# Altium PCB PMM_MSPC_22A.PcbDoc (part 1 of 5)
Units mm, origin at the board's own origin, x right, y up, seen from the top; angles counter-clockwise.
Board outline 86.91 x 61.9 mm, 4 copper layers (Top Layer, GroundPlane, MidLayer1, Bottom Layer); 159 components, 129 nets, 534 pads, 221 vias.
Unrouted connection lines stored in the file: 40.
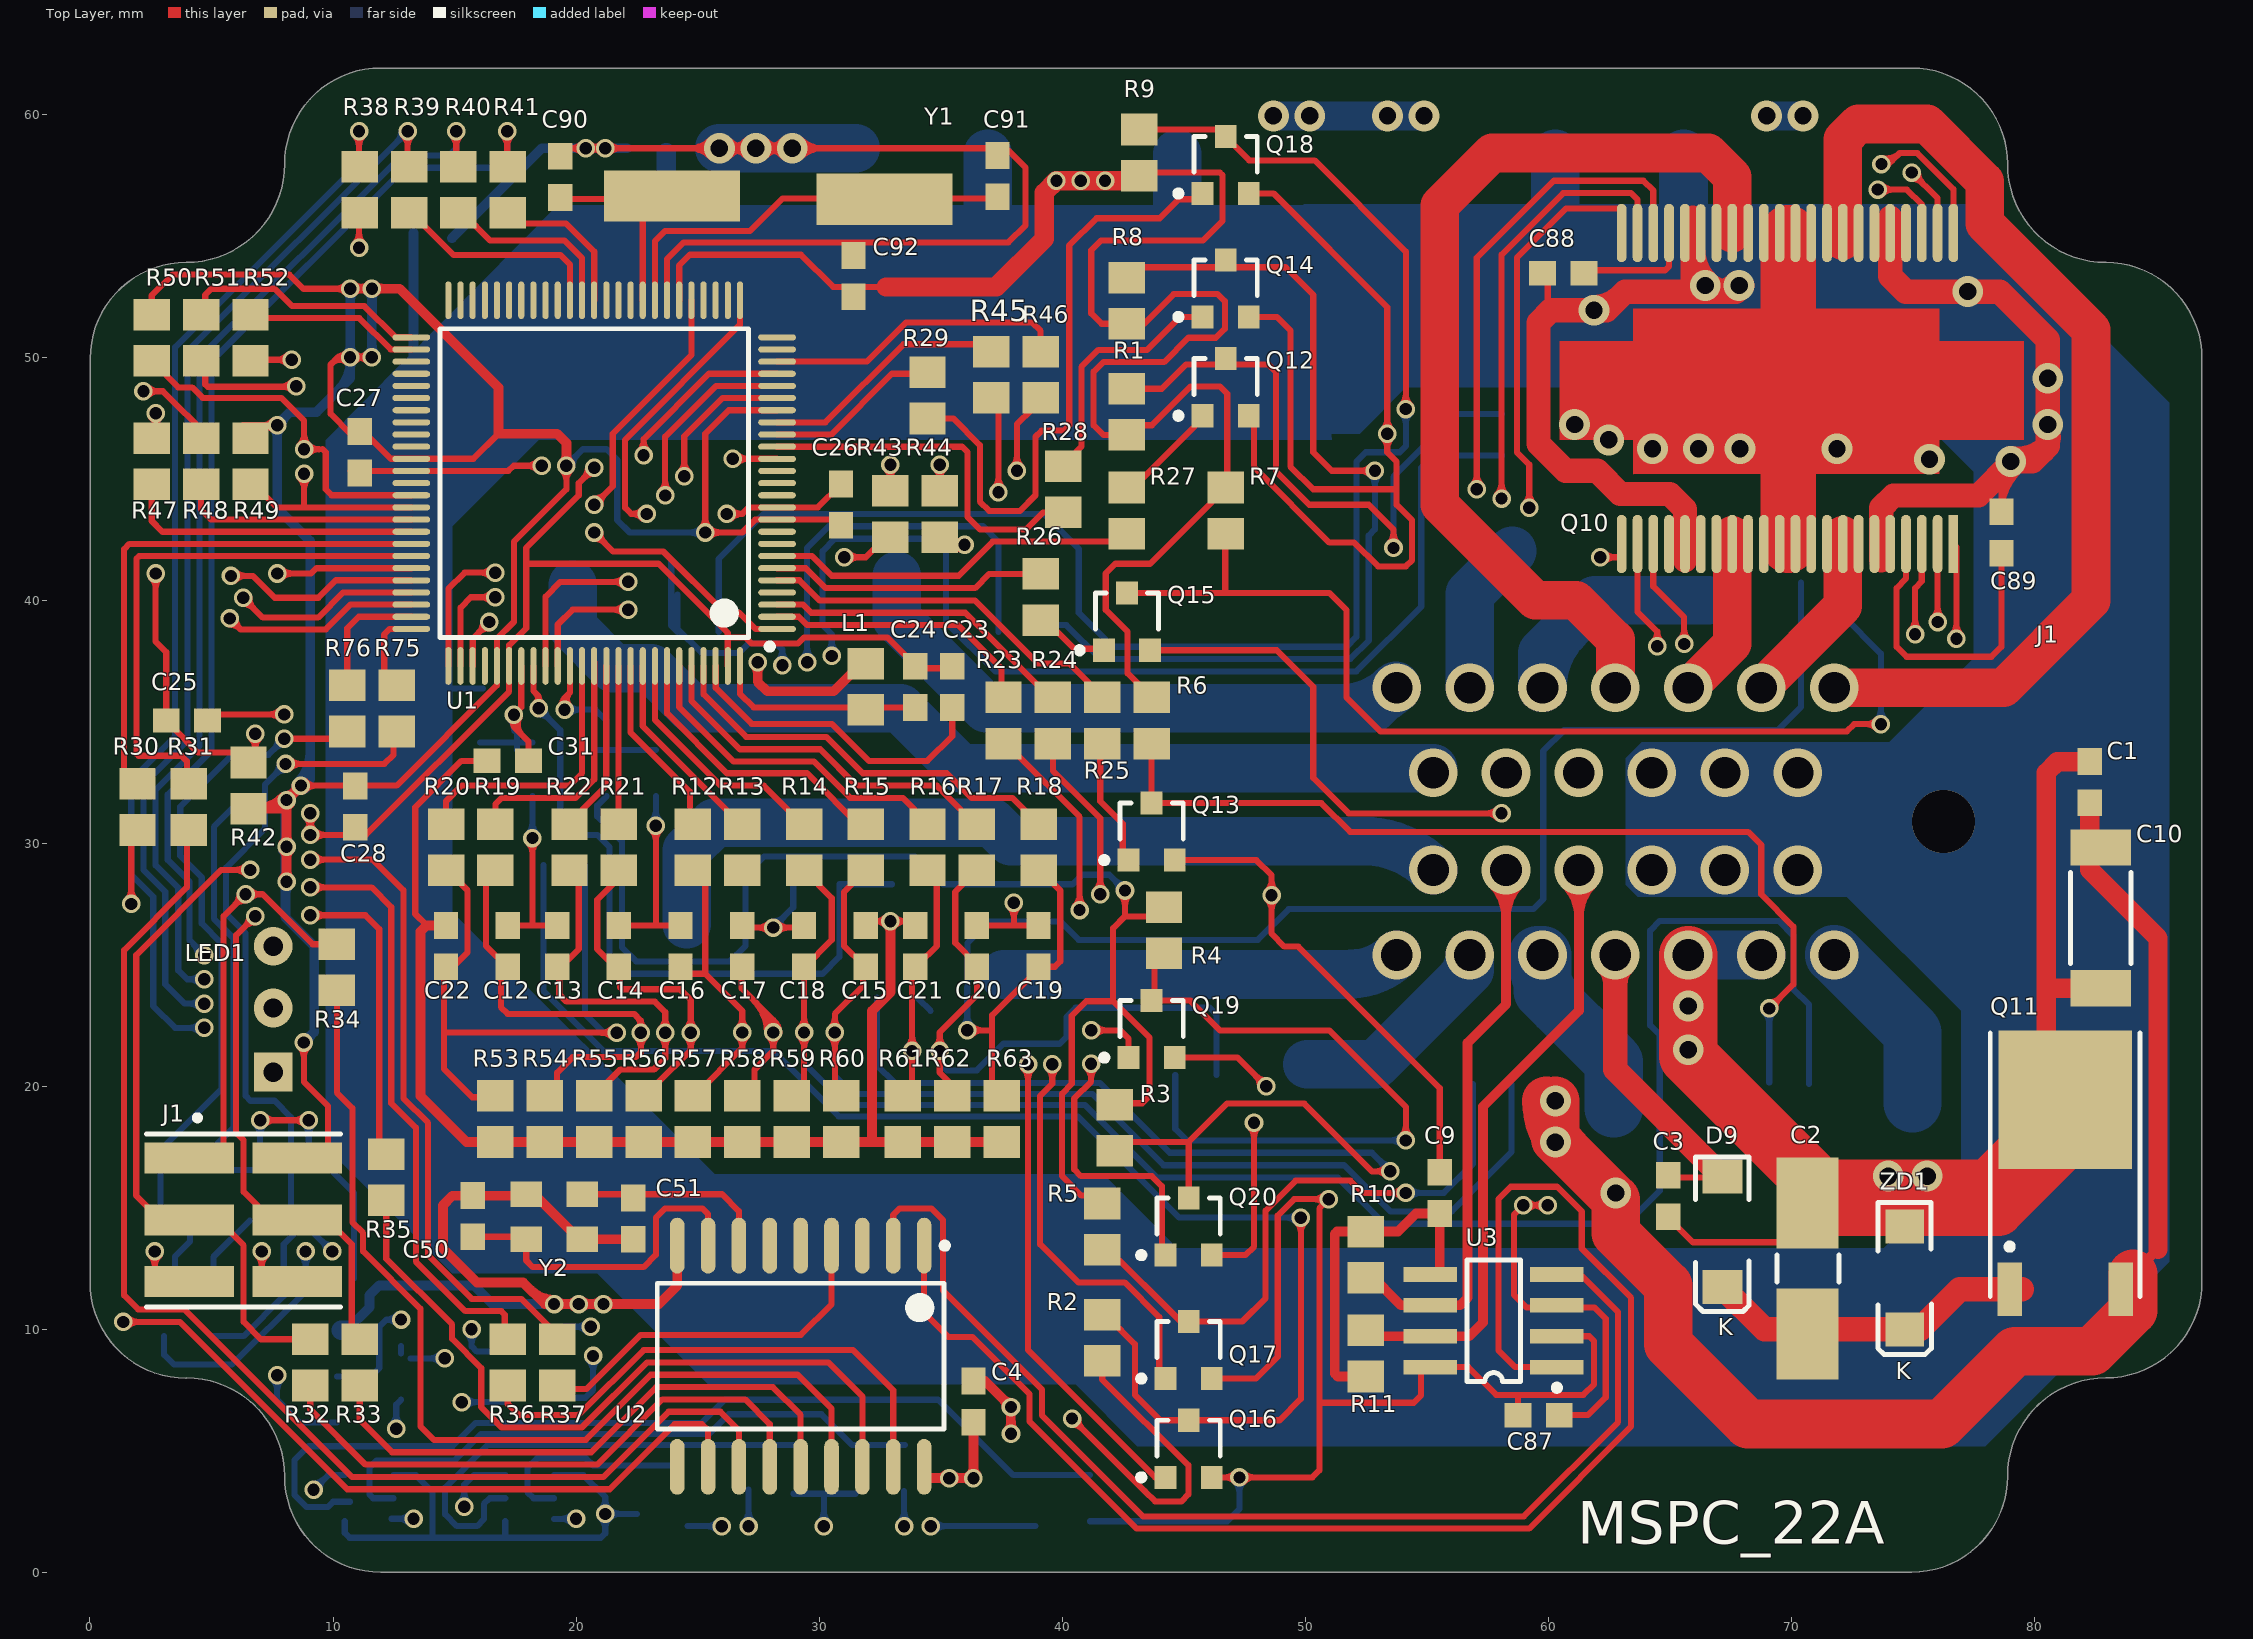
[diagram p0: Top Layer view]
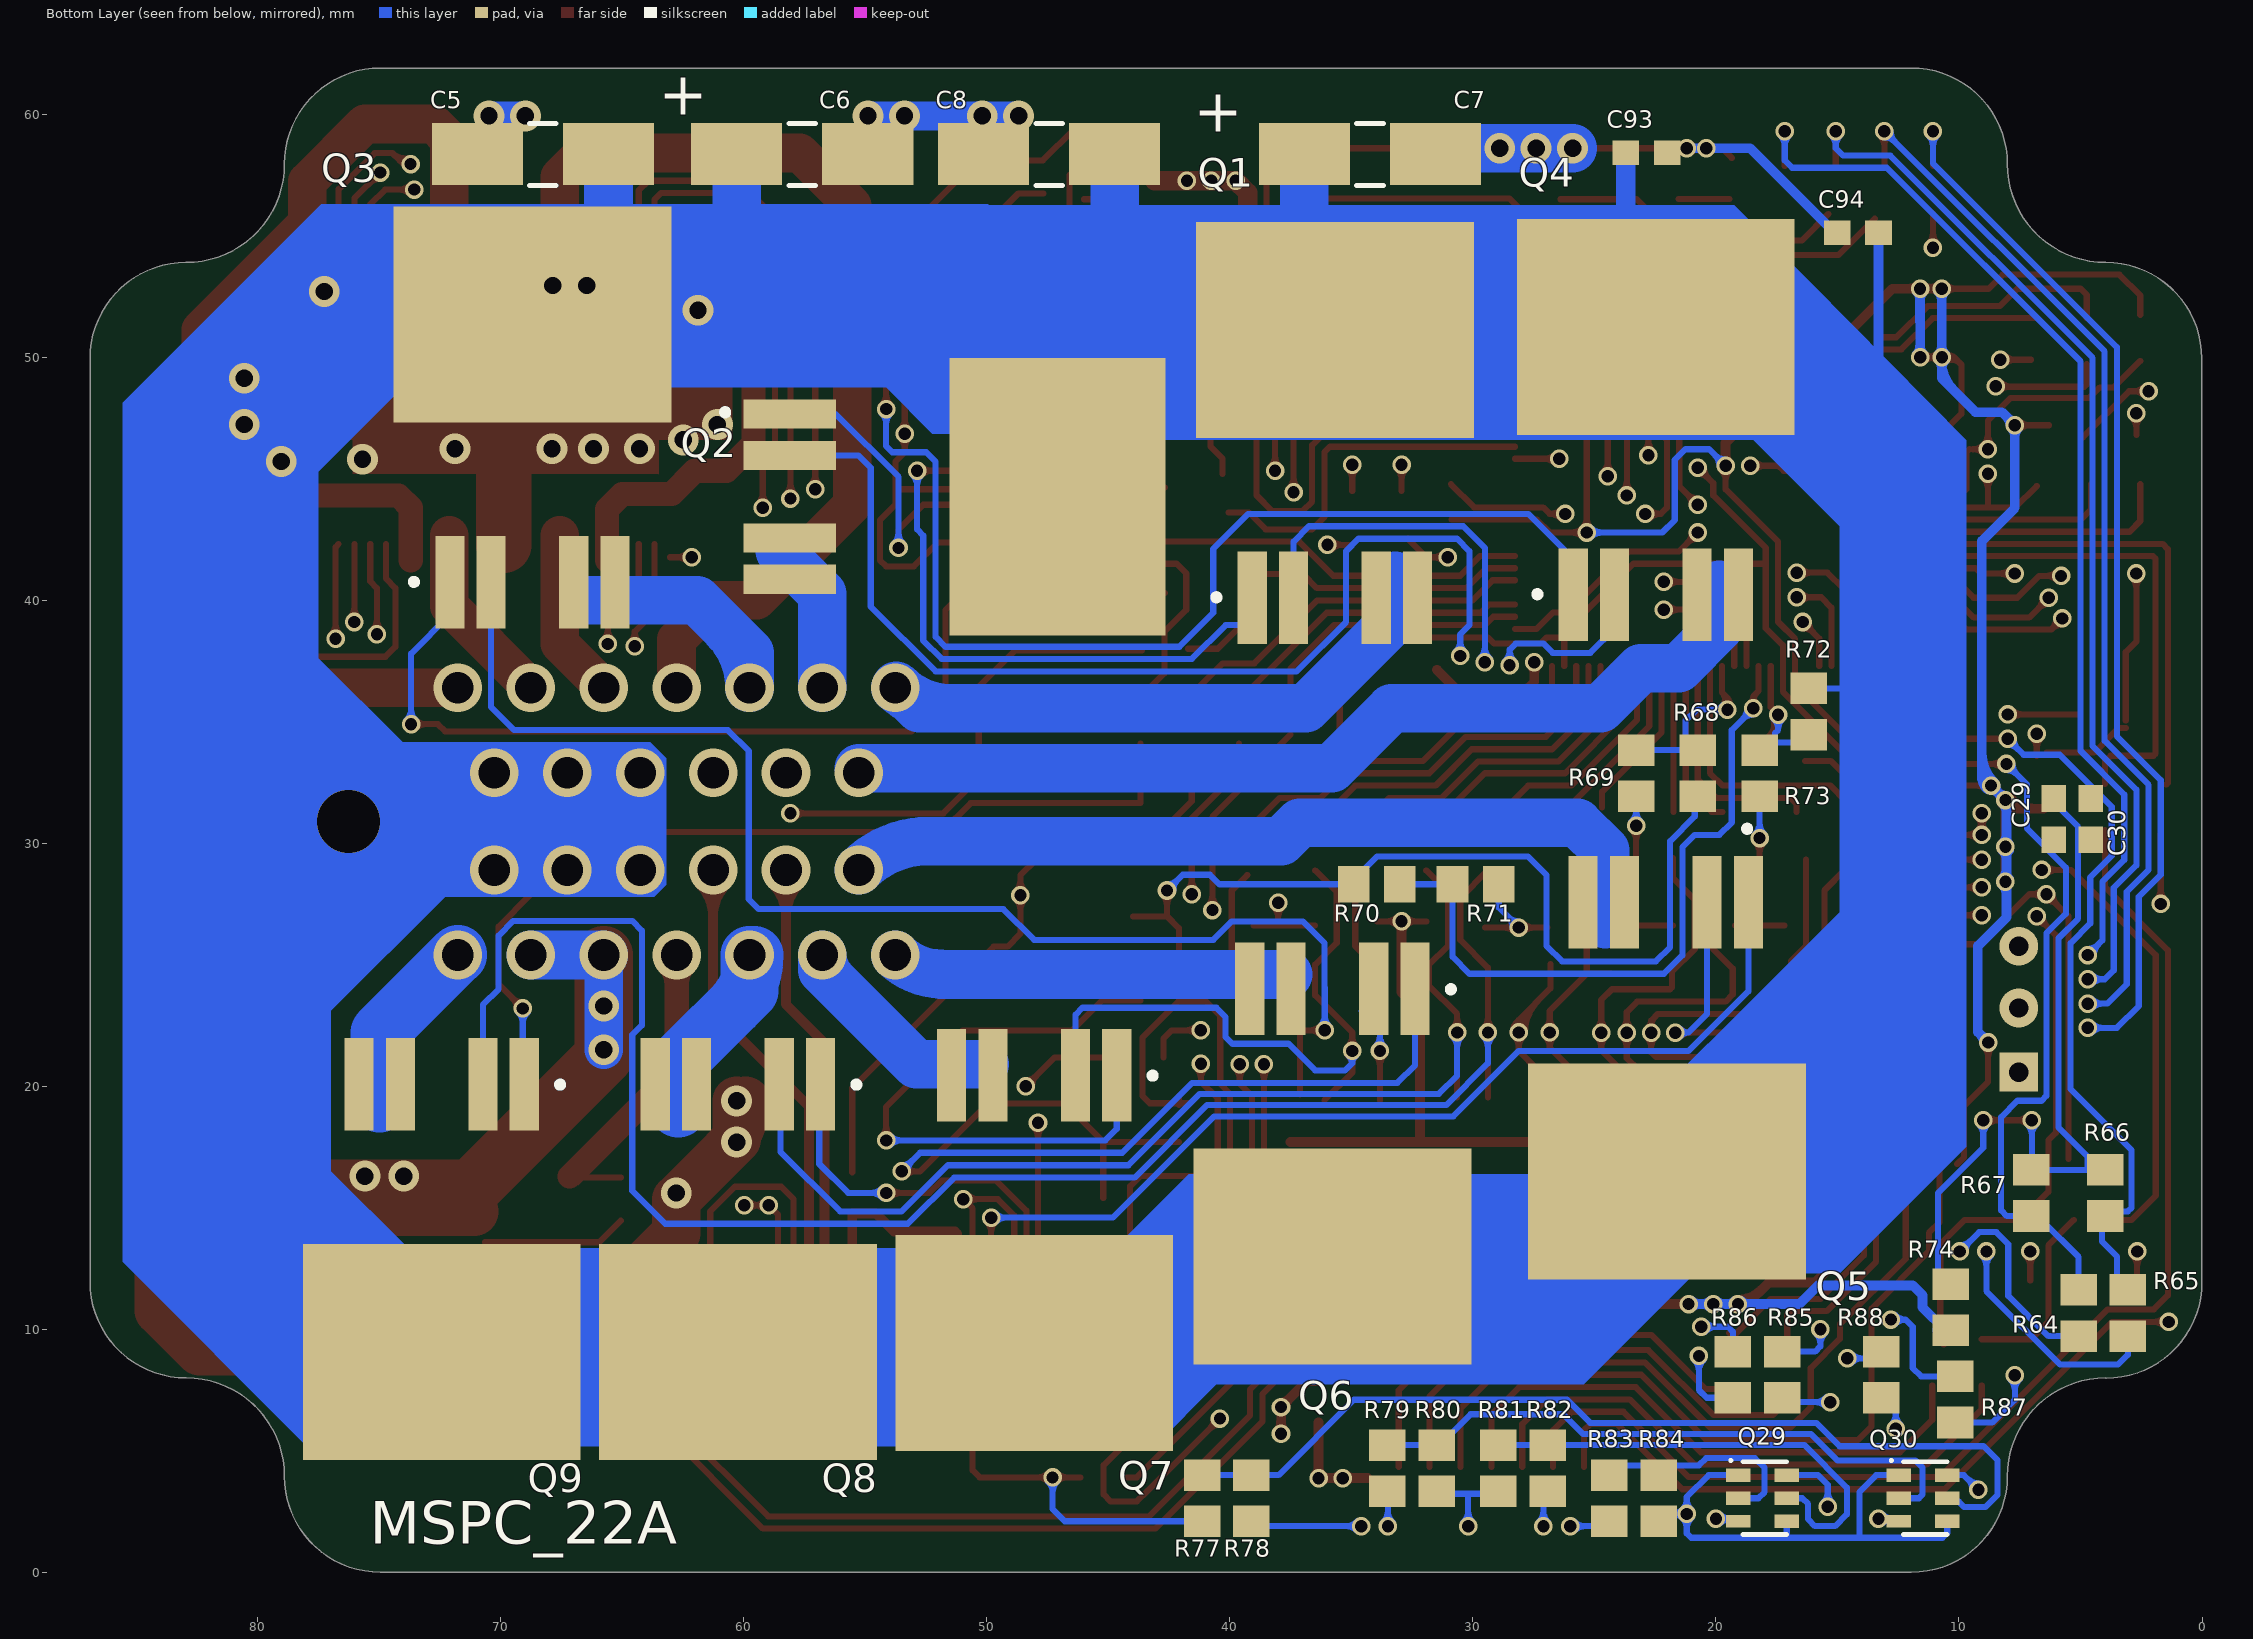
[diagram p1: Bottom Layer view, seen from below]
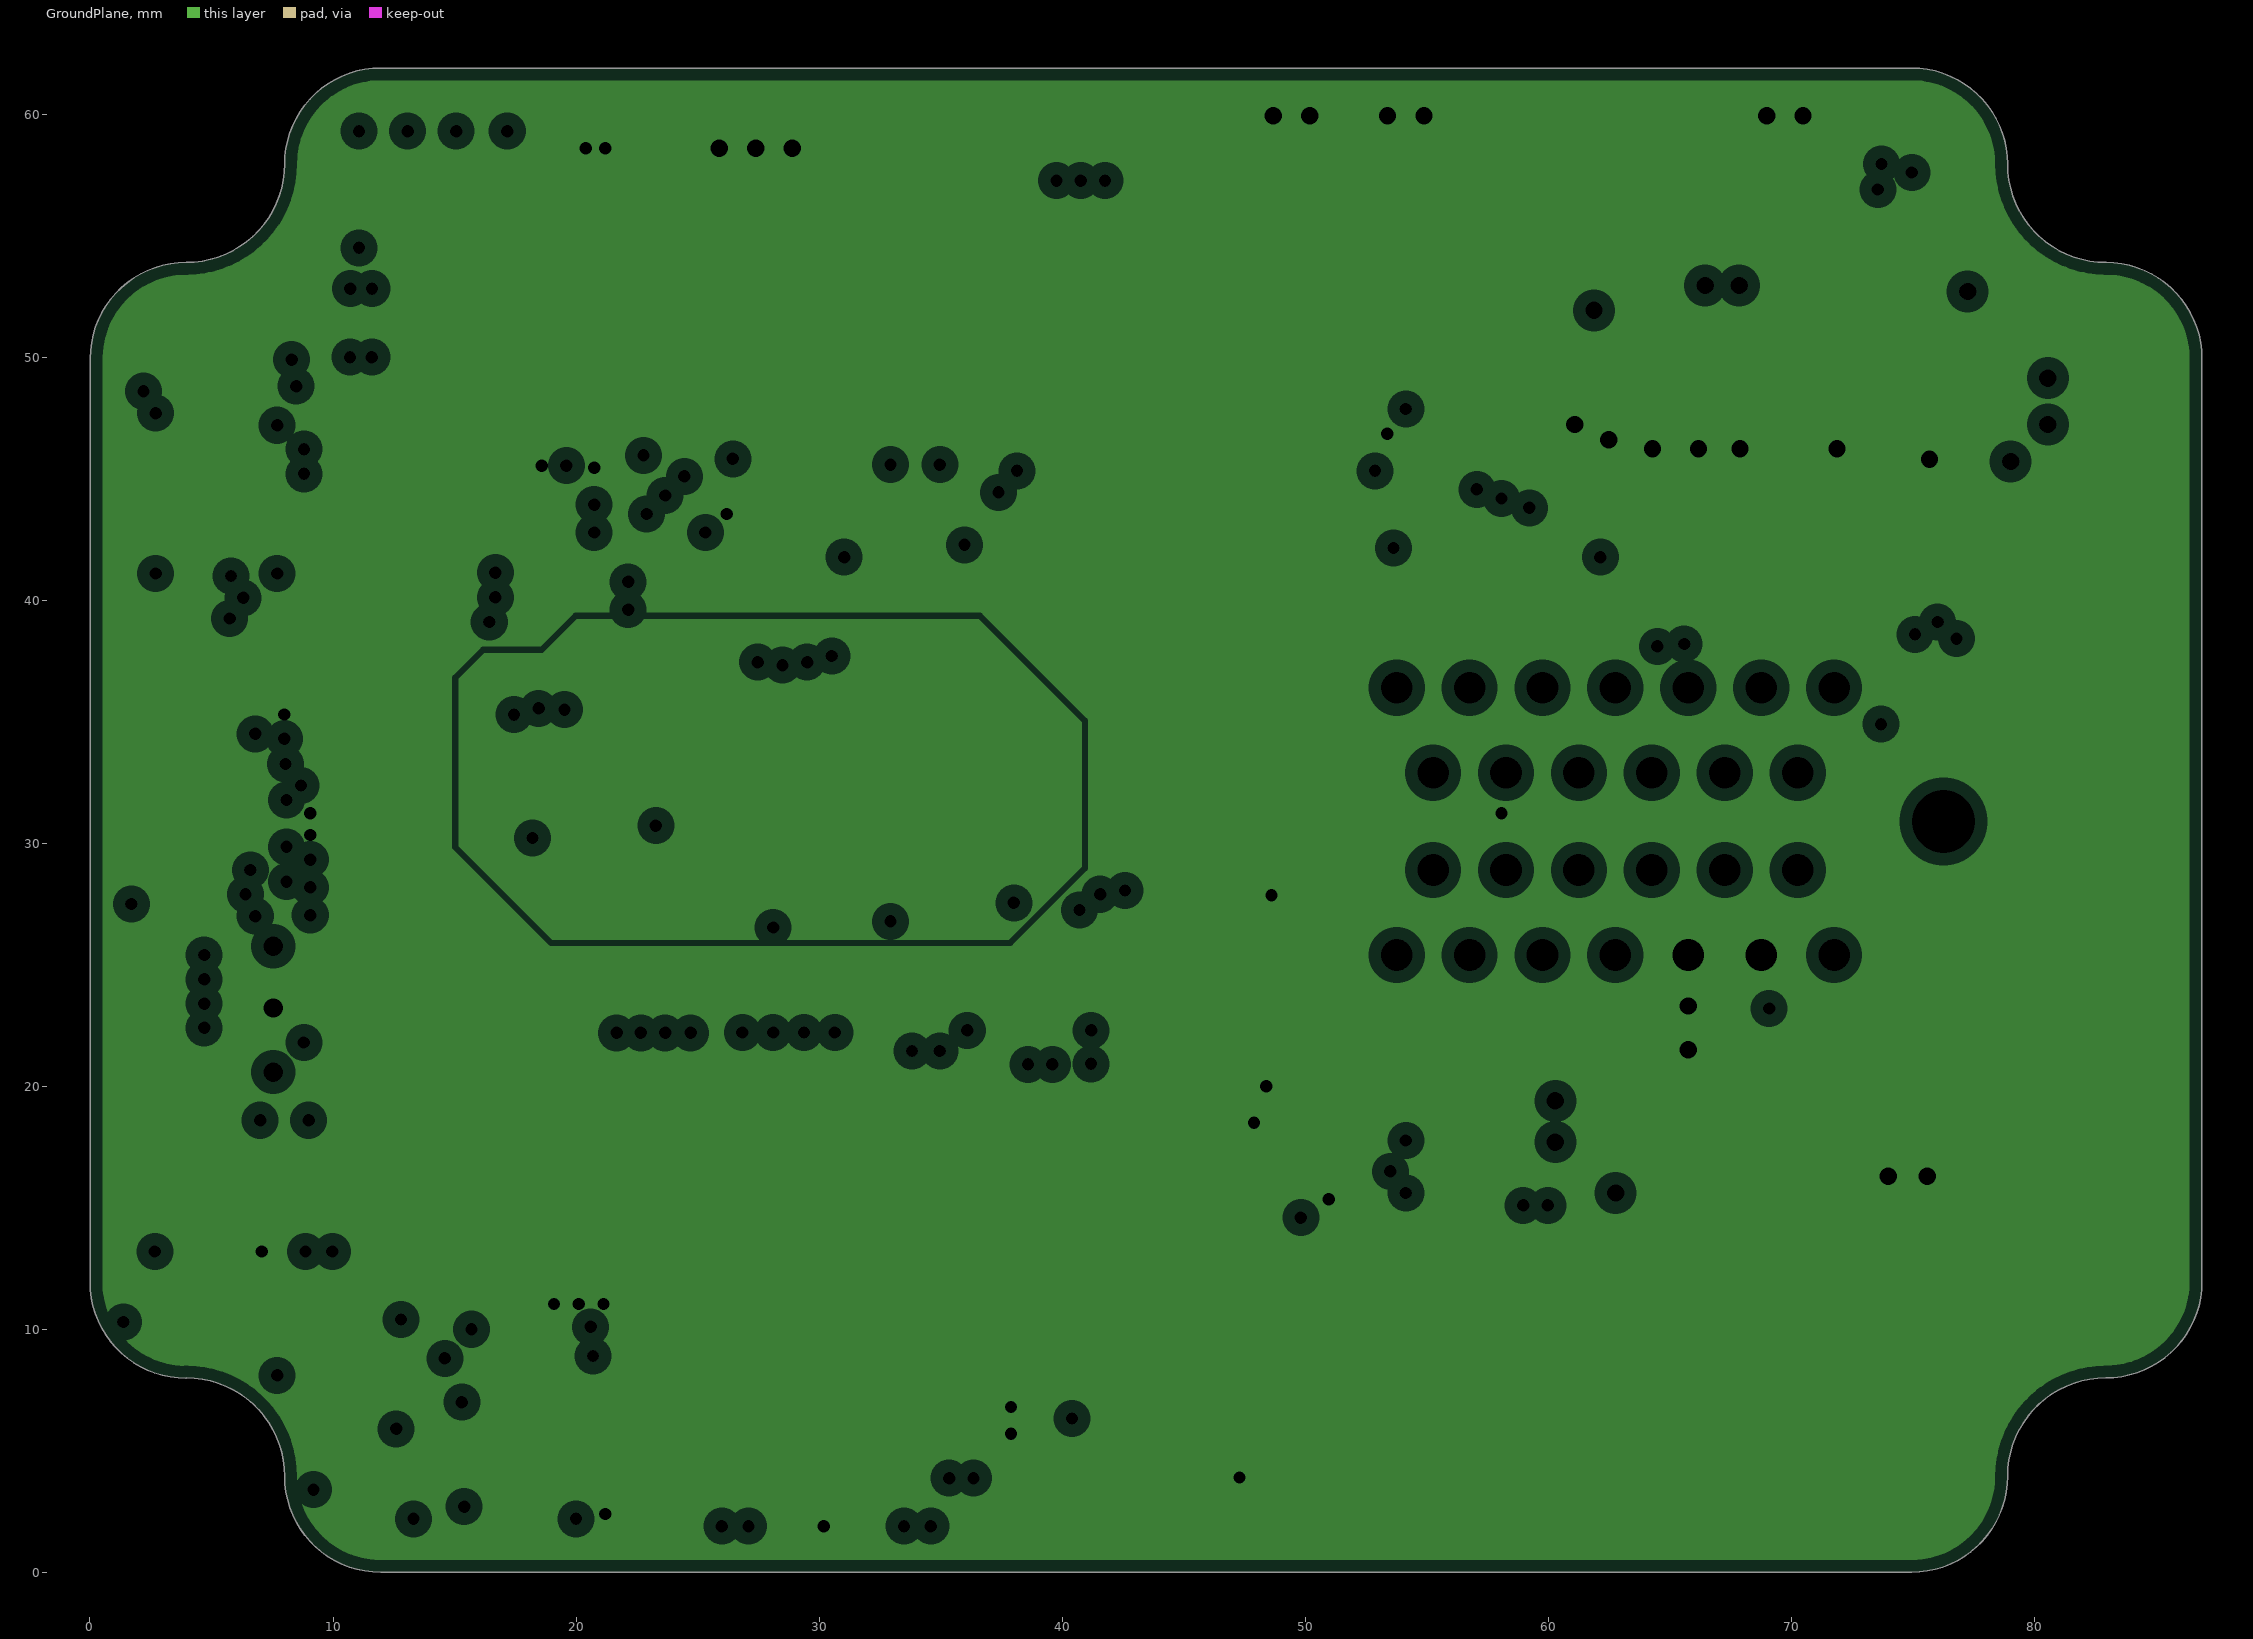
[diagram p2: GroundPlane, clearances drawn from the general rule]
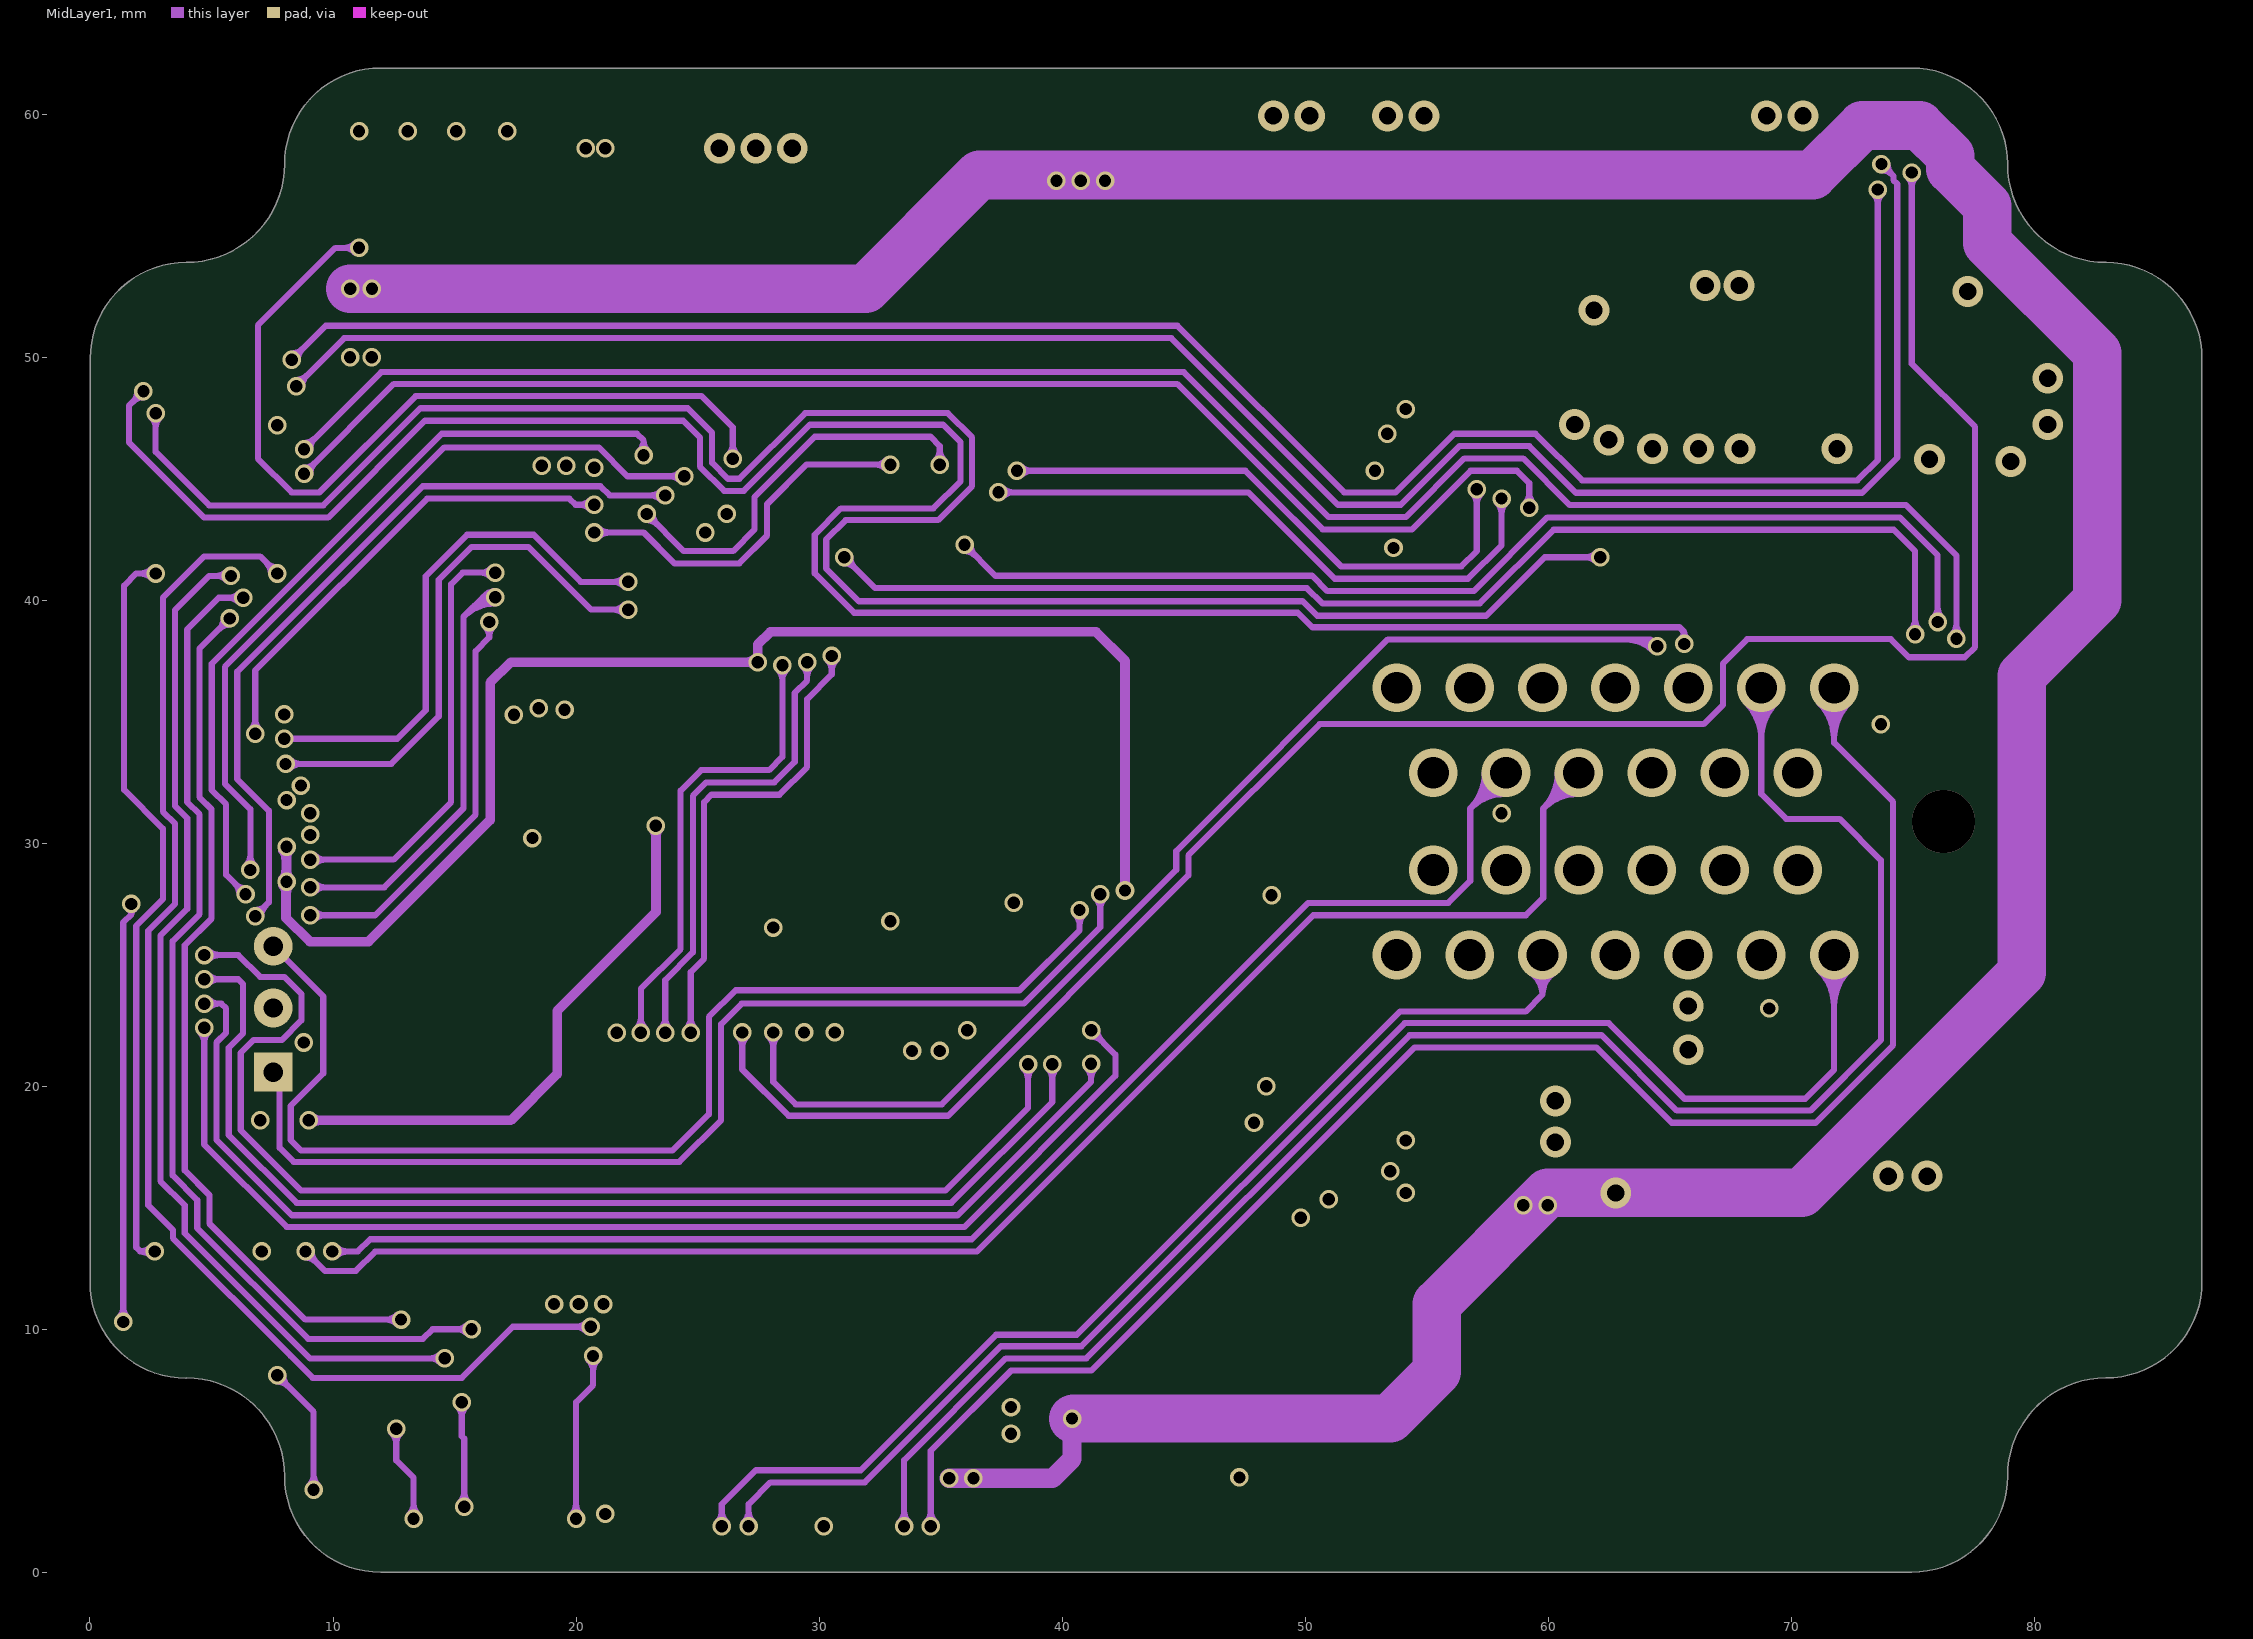
[diagram p3: MidLayer1]

## Layer stack, top to bottom
Top Solder: solder mask 0.0102, Solder Resist, Dk 3.5
Top Layer: signal copper 0.203
Dielectric1: core 0.32, FR-4, Dk 4.8
GroundPlane: plane copper 0.089, net GND
Dielectric3: prepreg 0.32, FR-4, Dk 4.8
MidLayer1: signal copper 0.089
Dielectric2: core 0.32, FR-4, Dk 4.8
Bottom Layer: signal copper 0.203
Bottom Solder: solder mask 0.0102, Solder Resist, Dk 3.5

## Board outline
0.001,11.935 ccw(c3.951,11.935) 3.951,7.985 3.96,8 cw(c3.96,3.95) 8.01,3.95 ccw(c11.96,3.95) 11.96,0 74.96,0 ccw(c74.96,3.95) 78.91,3.95 cw(c82.96,3.95) 82.96,8 ccw(c82.96,11.95) 86.91,11.95 86.91,49.95 ccw(c82.96,49.95) 82.96,53.9 cw(c82.96,57.95) 78.91,57.95 ccw(c74.96,57.95) 74.96,61.901 11.96,61.901 ccw(c11.96,57.95) 8.01,57.95 cw(c3.96,57.95) 3.96,53.9 ccw(c3.96,49.95) 0.01,49.95

## Design rules (kind name [scope] priority, off if disabled: settings)
Clearance [All] p1: gap=0.2 ignorepadtopadclearanceinfootprint=FALSE except(0: Arc-Hole Track-Hole SMDPad-Hole THPad-Hole Via-Hole Fill-Hole Poly-Hole Region-Hole Text-Hole)
FabricationTestPointUsage TestPointUsage [All] p1: valid=0 allowmultiple=FALSE
FabricationTestpoint Testpoint [All] p1: side=3 testpointundercomponent=TRUE minsize=1.016 maxsize=2.54 preferedsize=1.524 minholesize=0 maxholesize=1.016 preferedholesize=0.813 testpointgrid=0.025 allowsidetop=TRUE allowsidebottom=TRUE usegrid=TRUE gridtolerance=0
PlaneClearance [All] p1: clearance=0.508
PlaneConnect [All] p1: planeconnectstyle=Relief reliefexpansion=0.508 reliefentries=4 reliefconductorwidth=1 reliefairgap=0.254
PolygonConnect [All] p1: connectstyle=Relief reliefconductorwidth=0.254 reliefentries=4 polygonreliefangle="90 Angle" airgapwidth=0.254
RoutingVias [All] p1: holewidth=0.711 width=1.27 viastyle="Through Hole" minholewidth=0.4 minwidth=0.7 maxholewidth=10 maxwidth=10
SolderMaskExpansion [(IsVia)] p1: expansion=-1 istentingtop=FALSE
Width [All] p1: maxlimit=10 minlimit=0.2 preferedwidth=0.254
26 further rules are at their usual default settings.

## Classes and differential pairs
component class Power: C1 C2 C3 C10 D9 Q11 ZD1
component class Outputs: Q14 R8 R28
component class MCU: C24 C26 C27 C28 C92 J1 L1 LED1 R23 R24 R68 R69 U1 Y1
component class CANBUS: C4 R30 R31 R32 R33 R34 R35 R37 U2 Y2

## Components (designator, comment, footprint, x,y, rotation, side; value= is the part's Value field where it differs from the comment)
C1 "Comment" J1-0603 82.296,32.512 r90 top value=100pF
C2 "Comment" 6332[2512]#1 71.12,12.7 r90 top value=100pF
C3 "Comment" J1-0603 64.943,15.482 r90 top value=100pF
C4 "Comment" J1-0603 36.356,7.024 r90 top value=10uF
C5 "Comment" 6332[2512]#1 68.072,57.912 r180 bottom
C6 "Comment" 6332[2512]#1 57.404,57.912 r180 bottom
C7 "Comment" 6332[2512]#1 34.036,57.912 r180 bottom
C8 "Comment" 6332[2512]#1 47.244,57.912 r180 bottom
C9 "Comment" J1-0603 55.545,15.609 r270 top
C10 "Comment" 6332[2512]#2 82.296,26.924 r270 top value=100pF
C12 "Comment" J1-0603 17.191,25.769 r90 top
C13 "Comment" J1-0603 19.223,25.769 r90 top
C14 "Comment" J1-0603 21.763,25.769 r90 top
C15 "Comment" J1-0603 31.923,25.769 r90 top
C16 "Comment" J1-0603 24.303,25.769 r90 top
C17 "Comment" J1-0603 26.843,25.769 r90 top
C18 "Comment" J1-0603 29.383,25.769 r90 top
C19 "Comment" J1-0603 39.035,25.769 r90 top
C20 "Comment" J1-0603 36.495,25.769 r90 top
C21 "Comment" J1-0603 33.955,25.769 r90 top
C22 "Comment" J1-0603 14.651,25.769 r90 top
C23 "Comment" J1-0603 35.479,36.437 r270 top
C24 "Comment" J1-0603 33.955,36.437 r270 top value=100pF
C25 "Comment" J1-0603 3.986,35.052 r180 top value=10uF
C26 "Comment" J1-0603 30.907,43.93 r270 top value=0.1uF
C27 "Comment" J1-0603 11.095,46.089 r90 top value=0.1uF
C28 "Comment" J1-0603 10.911,31.505 r90 top value=0.1uF
C29 "Comment" J1-0603 6.096,30.988 r270 bottom
C30 "Comment" J1-0603 4.572,30.988 r90 bottom
C31 "Comment" J1-0603 17.191,33.389 r180 top
C50 "Comment" J1-0603 15.753,14.654 r90 top
C51 "Comment" J1-0603 22.353,14.554 r90 top
C87 "Comment" J1-0603 59.609,6.465 r0 top
C88 "Comment" J1-0603 60.625,53.455 r180 top
C89 "Comment" J1-0603 78.659,42.787 r270 top
C90 "Comment" J1-0603 19.351,57.419 r270 top
C91 "Comment" J1-0603 37.348,57.45 r90 top
C92 "Comment" J1-0603 31.418,53.34 r90 top value=0.1uF
C93 "Comment" J1-0603 22.86,58.42 r180 bottom
C94 "Comment" J1-0603 14.16,55.12 r180 bottom
D9 "Comment" SMC#1 67.175,15.482 r270 top
J1 "15-91-3060" SOT23-6#1 5.87,14.732 r270 top locked
L1 "Comment" 2012[0805]#1 31.923,36.437 r270 top value=10mH
LED1 "Comment" 369-03 7.539,23.48 r90 top locked
Q1 "Comment" SOP5(6)#1 36.495,45.962 r180 bottom locked
Q2 "Comment" SOP5(6)#1 52.243,45.073 r270 bottom locked
Q3 "Comment" SOP5(6)#1 69.515,46.597 r180 bottom locked
Q4 "Comment" SOP5(6)#1 23.287,46.089 r180 bottom locked
Q5 "Comment" SOP5(6)#2 21.255,21.705 r0 bottom locked
Q6 "Comment" SOP5(6)#1 34.971,18.149 r0 bottom locked
Q7 "Comment" SOP5(6)#1 47.244,14.593 r0 bottom locked
Q8 "Comment" SOP5(6)#1 59.436,14.224 r0 bottom
Q9 "Comment" SOP5(6)#1 71.628,14.224 r0 bottom
Q11 "" 369A-13 81.28,15.748 r0 top
Q12 "Comment" SOT23A 46.736,48.768 r0 top
Q13 "Comment" SOT23A 43.688,30.48 r0 top
Q14 "Comment" SOT23A 46.736,52.832 r0 top
Q15 "Comment" SOT23A 42.672,39.116 r0 top
Q16 "Comment" SOT23A 45.212,5.08 r0 top
Q17 "Comment" SOT23A 45.212,9.144 r0 top
Q18 "Comment" SOT23A 46.736,57.912 r0 top
Q19 "Comment" SOT23A 43.688,22.352 r0 top
Q20 "Comment" SOT23A 45.212,14.224 r0 top
Q29 "Comment" SOT23-6#2 18.288,3.048 r270 bottom
Q30 "Comment" SOT23-6#2 11.684,3.048 r270 bottom
R1 "Comment" 2012[0805]#1 42.672,47.752 r270 top
R2 "Comment" 2012[0805]#1 41.656,9.652 r270 top
R3 "Comment" 2012[0805]#1 42.164,18.288 r90 top
R4 "Comment" 2012[0805]#1 44.196,26.416 r90 top
R5 "Comment" 2012[0805]#1 41.656,14.224 r90 top
R6 "Comment" 2012[0805]#1 43.688,35.052 r90 top
R7 "Comment" 2012[0805]#1 46.736,43.688 r90 top
R8 "Comment" 2012[0805]#1 42.672,52.324 r90 top value=1K
R9 "Comment" 2012[0805]#1 43.18,58.42 r90 top
R10 "Comment" 2012[0805]#1 52.497,13.069 r270 top
R11 "Comment" 2012[0805]#1 52.497,9.005 r270 top
R12 "Comment" 2012[0805]#1 24.811,29.833 r270 top
R13 "Comment" 2012[0805]#1 26.843,29.833 r270 top
R14 "Comment" 2012[0805]#1 29.383,29.833 r270 top
R15 "Comment" 2012[0805]#1 31.923,29.833 r270 top
R16 "Comment" 2012[0805]#1 34.463,29.833 r270 top
R17 "Comment" 2012[0805]#1 36.495,29.833 r270 top
R18 "Comment" 2012[0805]#1 39.035,29.833 r270 top
R19 "Comment" 2012[0805]#1 16.683,29.833 r270 top
R20 "Comment" 2012[0805]#1 14.651,29.833 r270 top
R21 "Comment" 2012[0805]#1 21.763,29.833 r270 top
R22 "Comment" 2012[0805]#1 19.731,29.833 r270 top
R23 "Comment" 2012[0805]#1 37.592,35.052 r90 top value=220R
R24 "Comment" 2012[0805]#1 39.624,35.052 r90 top value=220R
R25 "Comment" 2012[0805]#1 41.656,35.052 r90 top
R26 "Comment" 2012[0805]#1 39.116,40.132 r90 top
R27 "Comment" 2012[0805]#1 42.672,43.688 r90 top
R28 "Comment" 2012[0805]#1 40.051,44.565 r90 top value=1K
R29 "Comment" 2012[0805]#1 34.463,48.429 r90 top
R30 "Comment" 2012[0805]#1 1.954,31.496 r270 top
R31 "Comment" 2012[0805]#1 4.064,31.496 r270 top
R32 "Comment" 2012[0805]#1 9.066,8.636 r270 top
R33 "Comment" 2012[0805]#1 11.098,8.636 r270 top
R34 "Comment" 2012[0805]#1 10.16,24.892 r270 top
R35 "Comment" 2012[0805]#1 12.192,16.256 r270 top
R36 "Comment" 2012[0805]#1 17.194,8.636 r270 top
R37 "Comment" 2012[0805]#1 19.226,8.636 r270 top
R38 "Comment" 2012[0805]#1 11.098,56.896 r90 top
R39 "Comment" 2012[0805]#1 13.13,56.896 r90 top
R40 "Comment" 2012[0805]#1 15.162,56.896 r90 top
R41 "Comment" 2012[0805]#1 17.194,56.896 r90 top
R42 "Comment" 2012[0805]#1 6.523,32.373 r90 top value=10K
R43 "Comment" 2012[0805]#1 32.939,43.549 r90 top
R44 "Comment" 2012[0805]#1 34.971,43.549 r90 top
R45 "Comment" 2012[0805]#1 37.084,49.276 r90 top
R46 "Comment" 2012[0805]#1 39.116,49.276 r90 top
R47 "Comment" 2012[0805]#1 2.54,45.72 r90 top
R48 "Comment" 2012[0805]#1 4.572,45.72 r90 top
R49 "Comment" 2012[0805]#1 6.604,45.72 r90 top
R50 "Comment" 2012[0805]#1 2.54,50.8 r90 top
R51 "Comment" 2012[0805]#1 4.572,50.8 r90 top
R52 "Comment" 2012[0805]#1 6.604,50.8 r90 top
R53 "Comment" 2012[0805]#1 16.683,18.657 r270 top
R54 "Comment" 2012[0805]#1 18.715,18.657 r270 top
R55 "Comment" 2012[0805]#1 20.747,18.657 r270 top
R56 "Comment" 2012[0805]#1 22.779,18.657 r270 top
R57 "Comment" 2012[0805]#1 24.811,18.657 r270 top
R58 "Comment" 2012[0805]#1 26.843,18.657 r270 top
R59 "Comment" 2012[0805]#1 28.875,18.657 r270 top
R60 "Comment" 2012[0805]#1 30.907,18.657 r270 top
R61 "Comment" 2012[0805]#1 33.447,18.657 r270 top
R62 "Comment" 2012[0805]#1 35.479,18.657 r270 top
R63 "Comment" 2012[0805]#1 37.511,18.657 r270 top
R64 "Comment" 2012[0805]#1 5.08,10.668 r270 bottom
R65 "Comment" 2012[0805]#1 3.048,10.668 r270 bottom
R66 "Comment" 2012[0805]#1 3.983,15.609 r270 bottom
R67 "Comment" 2012[0805]#1 7.031,15.609 r270 bottom
R68 "Comment" 2012[0805]#1 20.747,32.881 r270 bottom value=2.7K
R69 "Comment" 2012[0805]#1 23.287,32.881 r90 bottom
R70 "Comment" 2012[0805]#1 33.955,28.309 r0 bottom
R71 "Comment" 2012[0805]#1 29.891,28.309 r0 bottom
R72 "Comment" 2012[0805]#1 16.175,35.421 r90 bottom
R73 "Comment" 2012[0805]#1 18.207,32.881 r270 bottom
R74 "Comment" 2012[0805]#1 10.333,10.91 r270 bottom
R75 "Comment" 2012[0805]#1 12.619,35.548 r270 top
R76 "Comment" 2012[0805]#1 10.587,35.548 r270 top
R77 "Comment" 2012[0805]#1 41.148,3.048 r270 bottom
R78 "Comment" 2012[0805]#1 39.116,3.048 r270 bottom
R79 "Comment" 2012[0805]#1 33.528,4.28 r270 bottom
R80 "Comment" 2012[0805]#1 31.496,4.28 r270 bottom
R81 "Comment" 2012[0805]#1 28.956,4.28 r270 bottom
R82 "Comment" 2012[0805]#1 26.924,4.28 r270 bottom
R83 "Comment" 2012[0805]#1 24.384,3.048 r270 bottom
R84 "Comment" 2012[0805]#1 22.352,3.048 r270 bottom
R85 "Comment" 2012[0805]#1 17.272,8.128 r270 bottom
R86 "Comment" 2012[0805]#1 19.304,8.128 r270 bottom
R87 "Comment" 2012[0805]#1 10.16,7.112 r270 bottom
R88 "Comment" 2012[0805]#1 13.208,8.128 r270 bottom
U1 "main" SOT407-1_L 20.747,44.819 r180 top locked
U2 "Comment" SOL-18_N 29.244,8.89 r270 top
U3 "CAN xcvr" SO8 57.762,10.348 r90 top
Y1 "Comment" 2012[0805]#2 31.748,56.525 r180 top
Y2 "Comment" SOT223 16.353,12.304 r90 top
ZD1 "Comment" SMC#2 74.676,13.716 r270 top

## Footprints (in the part's own frame and the unit in brackets; to place one, negate y for a bottom-side part, rotate by r counter-clockwise, add the part's x,y. Pads: shape width x height; smd on the part's side, far side on the other; paste and mask are expansions set on the pad)
369-03 [mm] "TO, Thru-Hole, Vertical, Heatsink Mounted; 3 In-Line Leads; Pitch 2.28 mm"
  rect 1.6x1.6 hole 0.8: 1(-2.9,0)
  round 1.6 hole 0.8: 2(-0.26,0) 3(2.28,0)
369A-13 [mm] "D-PAK/TO-252-AA; 3 Leads (1 Cropped); Body 10.3 (inc. leads) x 6.7 mm (LxW max)"
  rect 1x2.2 smd: 1(-2.285,-4.1) 3(2.285,-4.1)
  rect 5.5x5.7 smd: 4(0,3.7)
  silkscreen extent -3.09,-4.4 3.09,6.45
2012[0805]#1 [mm] "Chip Resistor; Body 2.0 x 1.3 mm (LxW typ)"
  rect 1.3x1.5 smd: 1(-0.95,0) 2(0.95,0)
2012[0805]#2 [mm] "Chip Resistor; Body 2.0 x 1.3 mm (LxW typ)"
  rect 5.6x2.1 smd: 1(-0.95,0.025) 2(7.8,-0.1)
6332[2512]#1 [mm] "Chip Resistor; Body 6.3 x 3.2 mm (LxW typ)"
  rect 3.75x2.55 smd: 1(-2.9,0.45) 2(2.5,0.45)
  silkscreen extent -0.75,-0.85 0.35,1.7
6332[2512]#2 [mm] "Chip Resistor; Body 6.3 x 3.2 mm (LxW typ)"
  rect 1.5x2.5 smd: 1(-2.9,0.45) 2(2.9,0.45)
  silkscreen extent -1.88,-0.8 1.87,1.7
J1-0603 [mm] "Chip Resistor; Body 1.6 x 0.8 mm (LxW typ)"
  rect 1.1x1 smd: 1(-0.85,0) 2(0.85,0)
SMC#1 [mm] "DO-214-AB/SMC; 2 C-Bend Leads; Body 7.9 x 5.9 mm, inc. leads (LxW)"
  rect 1.4x1.64 smd: 1(-0.8,0) 2(3.75,0)
  silkscreen extent -1.6,-1.1 4.75,1.1
SMC#2 [mm] "DO-214-AB/SMC; 2 C-Bend Leads; Body 7.9 x 5.9 mm, inc. leads (LxW)"
  rect 1.4x1.58 smd: 1(-0.52,0) 2(3.72,0)
  silkscreen extent -1.5,-1.1 4.75,1.1
SO8 [mm] "Small Outline; 8 Leads; Body Width 3.9 mm; Pitch 1.27 mm"
  rect 0.6x2.2 smd: 1(-1.905,-2.6) 2(-0.635,-2.6) 3(0.635,-2.6) 4(1.905,-2.6) 5(1.905,2.6) 6(0.635,2.6) 7(-0.635,2.6) 8(-1.905,2.6)
  silkscreen extent -2.88,-2.72 2.5,1.1
SOL-18_N [mm] "SOIC, 18-Leads, Body 11.6x7.5mm, Pitch 1.27mm, IPC Medium Density"
  oval 2.3x0.6 smd: 1(-4.55,5.08) 2(-4.55,3.81) 3(-4.55,2.54) 4(-4.55,1.27) 5(-4.55,0) 6(-4.55,-1.27) 7(-4.55,-2.54) 8(-4.55,-3.81) 9(-4.55,-5.08) 10(4.55,-5.08) 11(4.55,-3.81) 12(4.55,-2.54) 13(4.55,-1.27) 14(4.55,0) 15(4.55,1.27) 16(4.55,2.54) 17(4.55,3.81) 18(4.55,5.08)
  silkscreen extent -4.67,-5.9 3,6.06, body extent -3.8,-5.95 3.8,5.95, height 2.65
SOP5(6)#1 [mm] "Small Outline; 6 Leads (1 Absent); Body Width 4.4 mm; Pitch 1.27 mm"
  rect 1.2x3.81 smd: 1(-2.588,-5.864) 2(-0.888,-5.864) 4(2.512,-5.864) 5(4.212,-5.864)
  rect 11.43x8.89 smd: 3(0.812,5.152)
  silkscreen extent -4.19,-5.97 -3.94,-5.72
SOP5(6)#2 [mm] "Small Outline; 6 Leads (1 Absent); Body Width 4.4 mm; Pitch 1.27 mm"
  rect 1.2x3.81 smd: 1(-2.588,-5.864) 2(-0.888,-5.864) 4(2.512,-5.864) 5(4.212,-5.864)
  rect 11.43x8.89 smd: 3(0.762,5.207)
  silkscreen extent -2.66,-9.01 -2.41,-8.77
SOT23-6#1 [mm] "SOT-23/SC-74A; 5 Leads; Body 3.1 x 3 mm, inc. leads (LxW max)"
  rect 1.27x3.68 smd: 1(-2.308,-1.78) 2(-2.308,2.66) 3(0.232,-1.78) 4(0.232,2.66) 5(2.772,-1.78) 6(2.772,2.66)
  silkscreen extent -3.3,-3.56 3.81,4.45
SOT23-6#2 [mm] "SOT-23/SC-74A; 5 Leads; Body 3.1 x 3 mm, inc. leads (LxW max)"
  rect 0.55x1 smd: 1(-0.95,-0.8) 2(0,-0.8) 4(0.95,1.2) 5(0,1.2) 6(-0.95,1.2)
  rect 0.5x1 smd: 3(0.95,-0.8)
  silkscreen extent -1.6,-1.15 1.5,1.2
SOT23A [mm] "SOT-23; 3 Leads; Body 3.0 x 2.5 mm, inc. leads (LxW max)"
  rect 0.9x0.95 smd: 1(-0.95,-1.175) 2(0.95,-1.175) 3(0,1.175)
  silkscreen extent -2.07,-1.3 1.3,1.18
SOT223 [mm] "SOT-223/SC-73; 4 Leads; Body 6.7 x 7.3 mm, inc. leads (LxW max)"
  rect 1.05x1.3 smd: 1(3.25,-3.9) 2(3.25,-1.6) 3(1.4,-1.6) 4(1.4,-3.9)
SOT407-1_L [mm] "Thin QFP, 100-Leads, Body 14x14mm, Pitch 0.5mm, IPC High Density"
  oval 1.55x0.25 smd: 1(-7.525,6) 2(-7.525,5.5) 3(-7.525,5) 4(-7.525,4.5) 5(-7.525,4) 6(-7.525,3.5) 7(-7.525,3) 8(-7.525,2.5) 9(-7.525,2) 10(-7.525,1.5) 11(-7.525,1) 12(-7.525,0.5) 13(-7.525,0) 14(-7.525,-0.5) 15(-7.525,-1) 16(-7.525,-1.5) 17(-7.525,-2) 18(-7.525,-2.5) 19(-7.525,-3) 20(-7.525,-3.5) 21(-7.525,-4) 22(-7.525,-4.5) 23(-7.525,-5) 24(-7.525,-5.5) 25(-7.525,-6) 51(7.525,-6) 52(7.525,-5.5) 53(7.525,-5) 54(7.525,-4.5) 55(7.525,-4) 56(7.525,-3.5) 57(7.525,-3) 58(7.525,-2.5) 59(7.525,-2) 60(7.525,-1.5) 61(7.525,-1) 62(7.525,-0.5) 63(7.525,0) 64(7.525,0.5) 65(7.525,1) 66(7.525,1.5) 67(7.525,2) 68(7.525,2.5) 69(7.525,3) 70(7.525,3.5) 71(7.525,4) 72(7.525,4.5) 73(7.525,5) 74(7.525,5.5) 75(7.525,6)
  oval 0.25x1.55 smd: 26(-6,-7.525) 27(-5.5,-7.525) 28(-5,-7.525) 29(-4.5,-7.525) 30(-4,-7.525) 31(-3.5,-7.525) 32(-3,-7.525) 33(-2.5,-7.525) 34(-2,-7.525) 35(-1.5,-7.525) 36(-1,-7.525) 37(-0.5,-7.525) 38(0,-7.525) 39(0.5,-7.525) 40(1,-7.525) 41(1.5,-7.525) 42(2,-7.525) 43(2.5,-7.525) 44(3,-7.525) 45(3.5,-7.525) 46(4,-7.525) 47(4.5,-7.525) 48(5,-7.525) 49(5.5,-7.525) 50(6,-7.525) 76(6,7.525) 77(5.5,7.525) 78(5,7.525) 79(4.5,7.525) 80(4,7.525) 81(3.5,7.525) 82(3,7.525) 83(2.5,7.525) 84(2,7.525) 85(1.5,7.525) 86(1,7.525) 87(0.5,7.525) 88(0,7.525) 89(-0.5,7.525) 90(-1,7.525) 91(-1.5,7.525) 92(-2,7.525) 93(-2.5,7.525) 94(-3,7.525) 95(-3.5,7.525) 96(-4,7.525) 97(-4.5,7.525) 98(-5,7.525) 99(-5.5,7.525) 100(-6,7.525)
  silkscreen extent -7.35,-6.35 6.35,6.85, body extent -7,-7 7,7, height 1.6

## Part data
C1 C3 C4 C24 C25 C26 C27 C28 C92: library part "Cap Semi", "Capacitor (Semiconductor SIM Model)", LatestRevisionDate=29-May-2009, LatestRevisionNote="IPC-7351 Footprint Added.", PackageDescription="Chip Capacitor", PackageReference=C1206, Published=8-Jun-2000, Publisher="Altium Limited"
C2 C10: library part "Cap Pol3", "Polarized Capacitor (Surface Mount)", LatestRevisionDate=29-May-2009, LatestRevisionNote="IPC-7351 Footprint Added.", PackageDescription="Chip Capacitor", PackageReference=C0805, Published=8-Jun-2000, Publisher="Altium Limited"
D9: library part Diode, "Default Diode", Code_JEDEC=DO-214-AB, LatestRevisionDate=17-Jul-2002, LatestRevisionNote="Re-released for DXP Platform.", PackageDescription="DO-214-AB/SMC; 2 C-Bend Leads; Body 7.9 x 5.9 mm, inc. leads (LxW)", PackageReference=SMC, PackageVersion=Sep-1996, Published=8-Jun-2000, Publisher="Altium Limited"
J1: library part "Header 3X2", "Header, 3-Pin, Dual row", LatestRevisionDate=17-Jul-2002, LatestRevisionNote="Re-released for DXP Platform.", Publisher="Altium Limited"
L1: library part Inductor, "Inductor", Code_IEC=1005, Code_JEITA=0402, LatestRevisionDate=29-May-2009, LatestRevisionNote="IPC-7351 Footprint Added.", PackageDescription="Chip Inductor", PackageReference=0402-A, Published=8-Jun-2000, Publisher="Altium Limited"
LED1: library part "Header 3", "Header, 3-Pin", LatestRevisionDate=17-Jul-2002, LatestRevisionNote="Re-released for DXP Platform.", Publisher="Altium Limited"
Q1: library part AUIR3313STRL
Q11: library part "Volt Reg", "Voltage Regulator", Supplier Part Number 1=296-20658-1-ND, LatestRevisionDate=29-May-2009, LatestRevisionNote="IPC-7351 Footprint Added.", PackageDescription="3-Pin Transistor Outline Package 2.54 mm Pitch, 15.1 mm Lead Span", PackageReference=D2PAK, Published=24-Mar-1999, Publisher="Altium Limited", Supplier 1=Digi-Key
Q14: library part CMP-1048-00538-1, "General Purpose Transistor, NPN Silicon, 3-Pin SOT-23, Pb-Free, Tape and Reel", Manufacturer="On Semiconductor", PartNumber=MMBT2222ALT1G, ComponentLink1Description="Manufacturer URL", ComponentLink1URL=http://www.onsemi.com/, ComponentLink2Description=Datasheet, ComponentLink2URL=http://www.onsemi.cn/pub_link/Collateral/MMBT2222LT1-D.PDF, ComponentLink3Description="Package Specification", ComponentLink3URL=http://www.onsemi.cn/pub_link/Collateral/318-08.PDF, DatasheetVersion="Rev. 10", fT Min (MHz)=300, IC Continuous (A)=0.6, Mounting Technology="Surface Mount", PackageDescription="3-Pin Small Outline Transistor, Body 2.92 x 1.3 mm, Pitch 0.95 mm", PackageReference=SOT-23-3-318-08, PackageVersion="Rev. AP, 11/2009", Packing="Tape and Reel", Polarity=NPN, RoHS=TRUE
Q29 Q30: library part "SW DPDT"
R1 R2 R3 R4 R5 R6 R7 R9 R10 R11 R12 R13 R14 R15 R16 R17 R18 R19 R20 R21 R22 R25 R26 R27 R29 R36 R38 R39 R40 R41 R43 R44 R45 R46 R47 R48 R49 R50 R51 R52 R53 R54 R55 R56 R57 R58 R59 R60 R61 R62 R63 R64 R65 R66 R67 R70 R71 R72 R73 R74 R75 R76 R77 R78 R79 R80 R81 R82 R83 R84 R85 R86 R87 R88: library part "Res Semi"
R8 R23 R24 R28 R42 R68: library part Res3, "Resistor", LatestRevisionDate=29-May-2009, LatestRevisionNote="IPC-7351 Footprint Added.", PackageDescription="Chip Resistor", PackageReference=J1-0603, Published=8-Jun-2000, Publisher="Altium Limited"
R30 R31 R32 R33 R34 R35 R37: library part Jumper, "Jumper Wire", LatestRevisionDate=17-Jul-2002, LatestRevisionNote="Re-released for DXP Platform.", PackageDescription="Radial Cap, Thru-Hole; 2 Leads; 0.2 in Pin Spacing", PackageReference=RAD-0.2, Published=24-Mar-1999, Publisher="Altium Limited"
R69: library part "Res Thermal", Code_IPC=RESC2012, LatestRevisionDate=29-May-2009, LatestRevisionNote="IPC-7351 Footprint Added.", PackageDescription="Chip Resistor 0805 Case Size", PackageReference=6-0805, PackageVersion=Mar-2003, Published=24-Mar-1999, Publisher="Altium Limited"
U1: library part CMP-0095-00211-2, "8-bit AVR Microcontroller, 2.7-5.5V, 8MHz, 128KB Flash, 4KB EEPROM, 8KB SRAM, 86 GPIO pins, 100-pin TQFP, Industrial Grade (-40°C to 85°C), Pb-Free", Code_JEDEC=MS-026-AED, ComponentLink1Description="Manufacturer URL", ComponentLink1URL=http://www.atmel.com/, ComponentLink2Description="ATmega640/1280/1281/2560/2561 Datasheet", ComponentLink2URL=http://www.atmel.com/dyn/resources/prod_documents/doc2549.pdf, ComponentLink3Description="ATmega640/1280/1281/2560/2561 Summary", ComponentLink3URL=http://www.atmel.com/dyn/resources/prod_documents/2549S.pdf, DatasheetVersion="revN, May-2011", PackageDescription="100-Pin Thin Profile Plastic Quad Flat Pack (TQFP), 14 x 14 x 1.0 mm Body, 0.5 mm Pitch", PackageReference=100A, PackageVersion="revD, Oct-2010", RevisionNote="DatasheetVersion & PackageVersion updated. URLs added."
U2: library part CMP-0186-00133-2, "Stand-Alone CAN Controller With SPI Interface, 18-Pin SOIC, Industrial Temperature", Code_JEDEC=MS-013, ComponentLink1Description="Manufacturer URL", ComponentLink1URL=http://www.microchip.com/, ComponentLink2Description=Datasheet, ComponentLink2URL=http://ww1.microchip.com/downloads/en/DeviceDoc/21801f.pdf, ComponentLink3Description="Package Specification", ComponentLink3URL=http://www.microchip.com/stellent/groups/techpub_sg/documents/packagingspec/en012702.pdf, DatasheetVersion="revF, Oct-2010", PackageDescription="18-Lead Plastic Small Outline (SO) - Wide 7.50mm Body [SOIC]", PackageReference=SOIC-SO18, PackageVersion="revBB, Aug-2009", RevisionNote="URLs added. DatasheetVersion updated."
U3: library part "SW DIP-4"
Y1: library part XTAL, "Crystal Oscillator", LatestRevisionDate=17-Jul-2002, LatestRevisionNote="Re-released for DXP Platform.", PackageDescription="Crystal, Thru-Hole; 2 Leads; Body 3.1 x 8.2 mm (Dia.xH)", PackageReference=R38, Published=8-Jun-2000, Publisher="Altium Limited"
Y2: library part CMP-2000-05693-1, "SMD Seam Crystal, 20 MHz, +/- 10 ppm, 10 pF, -20 to 70 degC, 4-Pin SMD, RoHS, Tape and Reel", ESR (Equivalent Series Resistance)=40Ohm, Frequency=20MHz, Frequency Stability=±10ppm, Load Capacitance=10pF, Manufacturer=TXC, Operating Mode=Fundamental, Operating Temperature=-20°C~70°C, Package / Case=4-SMD,NoLead(DFN,LCC), Package Description="4-Pin Surface Mount Device, Body 5 x 3.2 mm, Pitch 3.7 mm", Package Reference=7B-4, Standard Package=1, Catalog Drawings="7BSeriesTop /  / 7BSeriesBottom /  / 7BSeriesSide1 /  / 7BSeriesSide2 /  / 7BSeriesCircuit", Category=CrystalsandOscillators, Datasheet URL=http://www.txccrystal.com/images/pdf/7b-accuracy.pdf, Datasheet Version=02/2010, Dynamic Catalog=7BSeries, Family=Crystals, Frequency Tolerance=±10ppm, Height="0.041\"(1.05mm)", Manufacturer URL=http://www.txccorp.com/, Mounting Technology=SurfaceMount, Mounting Type=SurfaceMount, Other Names=887-1303-1, Packaging=CutTape(CT), Series=7B, Size / Dimension="0.197\"Lx0.126\"W(5.00mmx3.20mm)", Type=MHzCrystal
ZD1: library part "D Zener", "Zener Diode", LatestRevisionDate=17-Jul-2002, LatestRevisionNote="Re-released for DXP Platform.", PackageDescription="Diode, Thru-Hole; 2 Leads; 0.7 in Pin Spacing", PackageReference=DIODE-0.7, Published=8-Jun-2000, Publisher="Altium Limited"

## Free pads (board coordinates)
  rect 0.4x2.4 smd: 1(76.68,42.314)
  oval 0.4x2.4 smd: 2(76.03,42.314) 3(75.38,42.314) 4(74.73,42.314) 5(74.08,42.314) 6(73.43,42.314) 7(72.78,42.314) 8(72.13,42.314) 9(71.48,42.314) 10(70.83,42.314) 11(70.18,42.314) 12(69.53,42.314) 13(68.88,42.314) 14(68.23,42.314) 15(67.58,42.314) 16(66.93,42.314) 17(66.285,42.31) 18(65.635,42.31) 19(64.98,42.314) 20(64.33,42.314) 21(63.68,42.314) 22(63.03,42.314) 23(63.03,55.114) 24(63.68,55.114) 25(64.33,55.114) 26(64.98,55.114) 27(65.63,55.114) 28(66.285,55.1) 29(66.93,55.114) 30(67.58,55.114) 31(68.235,55.11) 32(68.88,55.114) 33(69.53,55.114) 34(70.18,55.114) 35(70.83,55.114) 36(71.48,55.114) 37(72.13,55.114) 38(72.78,55.114) 39(73.43,55.114) 40(74.08,55.114) 41(74.73,55.114) 42(75.38,55.114) 43(76.03,55.114) 44(76.68,55.114)

## Via types
v1: diameter 0.762, hole 0.508, Top Layer to Bottom Layer, 138 vias
v2: diameter 2, hole 1.3, Top Layer to Bottom Layer, 26 vias
v3: diameter 1.27, hole 0.711, Top Layer to Bottom Layer, tented top, 23 vias
v4: diameter 0.762, hole 0.508, Top Layer to Bottom Layer, tented bottom, 21 vias
v5: diameter 1.27, hole 0.711, Top Layer to Bottom Layer, 7 vias
v6: diameter 0.762, hole 0.508, Top Layer to Bottom Layer, tented both sides, 5 vias
v7: diameter 2.6, hole 2.6, Top Layer to Bottom Layer, 1 vias

## Nets (pads, with @x,y where several pads share a name; then routed paths per layer and width w, separated by ;. In a path a pad name is that pad's centre, name@x,y a point inside that pad or via, vN(x,y) a via of type N, cw(c..) or ccw(c..) an arc to the next point about the centre after c; other vN are vias at no path point)
5V: C1.1 C4.1 C10.1 C26.2 C27.2 C28.2 C87.2 C92.1 J1.2 L1.1 Q11.3 R1.2 R2.2 R3.2 R4.2 R5.2 R6.2 R7.2 R8.1 R9.1 R42.1 R49.2 R50.2 R68.2 R70.2 U1.10 U1.19 U1.31 U1.61 U1.80 U2.18 U3.3 | length 733
  Top Layer w0.254: R50.2@2.54,51.75 2.54,52.54 3.4,53.4 8.2,53.4 8.78,52.82 v1(10.714,52.82) ; R49.2@6.3,47.2 v1(7.7,47.2) ; v1@7.52,47.02 ccw(c7.087,46.587) 7.087,47.2 ccw(c7.087,47.813) v1@7.52,47.38 ; v1@8.62,21.62 cw(c8.187,21.187) 8.8,21.187 cw(c9.413,21.187) v1@8.98,21.62 ; v1(8.682,32.373) 12.619,32.373 16.747,36.501 16.747,38.406 17.445,39.104 17.445,42.406 19.604,44.565 v1(19.604,45.535) ; v1(8.8,21.8) 8.8,20.183 9.793,19.191 9.793,17.077 J1.2@10.07,16.8 ; 9.95,49.75 cw(c10.276,49.424) v1@10.549,49.795 ; 9.984,49.784 cw(c10.543,49.226) v1(10.7,50) ccw(c10.453,49.665) 10.159,49.959 ; v1@10.495,49.85 ccw(c10.2,49.635) 10.2,50 ; v1@10.495,50.15 cw(c10.2,50.365) 10.2,50 ; v1@10.534,52.64 ccw(c10.101,52.207) 10.101,52.82 ccw(c10.101,53.433) v1@10.534,53 ; v1@10.88,49.82 cw(c11.313,49.387) 11.313,50 cw(c11.313,50.613) v1@10.88,50.18 ; v1@11.42,49.82 ccw(c10.987,49.387) 10.987,50 ccw(c10.987,50.613) v1@11.42,50.18 ; v1(11.6,50) 10.2,50 ; 16.81,46.851 15.778,45.819 12.381,45.819 11.349,46.851 10.714,46.851 9.9,47.665 9.9,49.7 10.2,50 ; v1@19.424,45.355 cw(c18.991,44.922) 19.604,44.922 cw(c20.217,44.922) v1@19.784,45.355 ; U1.31@24.247,52.344 24.247,53.78 24.684,54.217 29.253,54.217 30.58,52.89 31.418,52.89 32.775,52.89 ; U1.19@28.272,47.819 26.287,47.819 25.319,46.851 v1(25.319,42.787) 26.843,42.787 27.375,43.319 C26.2@30.883,43.319 ; v1(40.411,6.325) 43.413,3.335 43.836,2.913 44.917,2.915 45.202,3.202 45.2,4.403 41.658,7.931 R2.2@41.656,8.702 ; R5.2@41.656,15.174 R5.2@42.074,15.174 ; R3.2@41.656,19.3 43.3,19.3 43.6,19.6 43.6,22 42.1,23.5 ; R5.2@41.9,15.5 40.8,15.5 40,16.3 40,19.7 40.4,20.1 40.4,22.9 41,23.5 42.1,23.5 ; R3.2@42.1,19.238 R3.2@42.1,19.6 ; R1.2@42.3,47.2 43.7,47.2 45.3,48.8 46.5,48.8 46.8,48.5 46.8,44.674 43.626,41.5 42.2,41.5 41.8,41.1 41.8,39.6 42.7,38.7 42.7,36.99 R6.2@43.688,36.002 ; R1.2@42.5,46.8 41.7,46.8 41.3,47.2 41.3,49.4 41.7,49.8 44.2,49.8 45.2,50.8 46.326,50.8 46.7,51.174 46.7,52.3 46.4,52.6 44.6,52.6 43.374,51.374 R8.1@42.672,51.374 41.626,51.374 41.199,51.801 41.199,54.399 41.6,54.8 45.8,54.8 46.6,55.6 46.6,57.5 46.5,57.6 R9.1@43.18,57.6 ; v1(42.591,28.055) 42.591,26.991 ; R4.2@43.991,26.991 42.591,26.991 ; v1(59.99,15.101) v1(58.974,15.101) 58.593,14.72 58.593,11.418 59.113,10.898 61.907,10.898 62.371,10.434 62.371,7.195 61.641,6.465 C87.2@60.459,6.465 ; 84.073,11.648 84.073,12.273 ; v1@8.862,32.193 cw(c9.295,31.76) 9.295,32.373 ; v1@8.862,32.193 cw(c9.295,31.76) 9.295,32.373 ; v1@8.862,32.193 cw(c9.295,31.76) 9.295,32.373 ; v1@8.862,32.193 cw(c9.295,31.76) 9.295,32.373 ; v1@8.862,32.193 cw(c9.295,31.76) 9.295,32.373 ; v1@8.862,32.553 ccw(c9.295,32.986) 9.295,32.373 ; v1@8.862,32.553 ccw(c9.295,32.986) 9.295,32.373 ; v1@8.862,32.553 ccw(c9.295,32.986) 9.295,32.373 ; v1@8.862,32.553 ccw(c9.295,32.986) 9.295,32.373 ; v1@8.862,32.553 ccw(c9.295,32.986) 9.295,32.373 ; v1@19.424,45.655 cw(c18.991,45.222) v1@19.604,45.222 ; v1@19.424,45.655 cw(c18.991,45.222) v1@19.604,45.222 ; v1@19.424,45.655 cw(c18.991,45.222) v1@19.604,45.222 ; v1@19.424,45.655 cw(c18.991,45.222) v1@19.604,45.222 ; v1@19.604,45.222 cw(c20.217,45.222) v1@19.784,45.655 ; v1@19.604,45.222 cw(c20.217,45.222) v1@19.784,45.655 ; v1@19.604,45.222 cw(c20.217,45.222) v1@19.784,45.655 ; v1@19.604,45.222 cw(c20.217,45.222) v1@19.784,45.655 ; v1@25.139,42.967 ccw(c24.706,43.4) 25.319,43.4 ; v1@25.139,42.967 ccw(c24.706,43.4) 25.319,43.4 ; v1@25.139,42.967 ccw(c24.706,43.4) 25.319,43.4 ; v1@25.139,42.967 ccw(c24.706,43.4) 25.319,43.4 ; v1@25.139,42.967 ccw(c24.706,43.4) 25.319,43.4 ; 25.319,43.4 ccw(c25.932,43.4) v1@25.499,42.967 ; 25.319,43.4 ccw(c25.932,43.4) v1@25.499,42.967 ; 25.319,43.4 ccw(c25.932,43.4) v1@25.499,42.967 ; 25.319,43.4 ccw(c25.932,43.4) v1@25.499,42.967 ; 25.319,43.4 ccw(c25.932,43.4) v1@25.499,42.967 ; v1@25.499,42.607 cw(c25.932,42.174) 25.932,42.787 ; v1@25.499,42.607 cw(c25.932,42.174) 25.932,42.787 ; v1@25.499,42.607 cw(c25.932,42.174) 25.932,42.787 ; v1@25.499,42.607 cw(c25.932,42.174) 25.932,42.787 ; v1@25.499,42.607 cw(c25.932,42.174) 25.932,42.787 ; v1@25.499,42.967 ccw(c25.932,43.4) 25.932,42.787 ; v1@25.499,42.967 ccw(c25.932,43.4) 25.932,42.787 ; v1@25.499,42.967 ccw(c25.932,43.4) 25.932,42.787 ; v1@25.499,42.967 ccw(c25.932,43.4) 25.932,42.787 ; v1@25.499,42.967 ccw(c25.932,43.4) 25.932,42.787 ; v1@40.412,6.071 cw(c40.413,5.458) 40.845,5.892 ; v1@40.412,6.071 cw(c40.413,5.458) 40.845,5.892 ; v1@40.412,6.071 cw(c40.413,5.458) 40.845,5.892 ; v1@40.665,6.326 ccw(c41.278,6.327) 40.845,5.892 ; v1@40.665,6.326 ccw(c41.278,6.327) 40.845,5.892 ; v1@40.665,6.326 ccw(c41.278,6.327) 40.845,5.892 ; 42.1,23.5 42.1,26.5 42.591,26.991 ; v1@42.411,27.875 cw(c41.978,27.442) 42.591,27.442 ; v1@42.411,27.875 cw(c41.978,27.442) 42.591,27.442 ; v1@42.411,27.875 cw(c41.978,27.442) 42.591,27.442 ; v1@42.411,27.875 cw(c41.978,27.442) 42.591,27.442 ; v1@42.411,27.875 cw(c41.978,27.442) 42.591,27.442 ; 42.591,27.442 cw(c43.204,27.442) v1@42.771,27.875 ; 42.591,27.442 cw(c43.204,27.442) v1@42.771,27.875 ; 42.591,27.442 cw(c43.204,27.442) v1@42.771,27.875 ; 42.591,27.442 cw(c43.204,27.442) v1@42.771,27.875 ; 42.591,27.442 cw(c43.204,27.442) v1@42.771,27.875 ; v1@59.154,14.921 cw(c59.587,14.488) 59.587,15.101 ; v1@59.154,14.921 cw(c59.587,14.488) 59.587,15.101 ; v1@59.154,14.921 cw(c59.587,14.488) 59.587,15.101 ; v1@59.154,14.921 cw(c59.587,14.488) 59.587,15.101 ; v1@59.154,14.921 cw(c59.587,14.488) 59.587,15.101 ; v1@59.154,15.281 ccw(c59.587,15.714) 59.587,15.101 ; v1@59.154,15.281 ccw(c59.587,15.714) 59.587,15.101 ; v1@59.154,15.281 ccw(c59.587,15.714) 59.587,15.101 ; v1@59.154,15.281 ccw(c59.587,15.714) 59.587,15.101 ; v1@59.154,15.281 ccw(c59.587,15.714) 59.587,15.101 ; 59.377,15.101 ccw(c59.377,15.714) v1@59.81,15.281 ; 59.377,15.101 cw(c59.377,14.488) v1@59.81,14.921 ; 59.377,15.101 ccw(c59.377,15.714) v1@59.81,15.281 ; 59.377,15.101 cw(c59.377,14.488) v1@59.81,14.921 ; 59.377,15.101 ccw(c59.377,15.714) v1@59.81,15.281 ; 59.377,15.101 cw(c59.377,14.488) v1@59.81,14.921 ; 59.377,15.101 ccw(c59.377,15.714) v1@59.81,15.281 ; 59.377,15.101 cw(c59.377,14.488) v1@59.81,14.921 ; 59.377,15.101 ccw(c59.377,15.714) v1@59.81,15.281 ; 59.377,15.101 cw(c59.377,14.488) v1@59.81,14.921
  Top Layer w0.4: R42.1@6.523,31.423 7.732,31.423 v1(8.682,32.373) ; v4(8.087,28.417) v1(8.087,31.778) ; v1(10.714,52.82) 12.746,52.82 16.81,48.756 16.81,46.851 19.223,46.851 19.604,46.47 v1(19.604,45.535) ; v1@19.476,45.663 ccw(c19.167,45.972) 19.604,45.972 ccw(c20.041,45.972) v1@19.732,45.663 ; v1(27.478,37.453) 27.478,36.642 27.87,36.25 30.593,36.25 L1.1@31.478,37.136 ; U2.18@34.342,3.875 v1(36.356,3.875) C4.1@36.356,6.174 ; 84.073,12.273 85.1,13.3 ; R42.1@6.793,31.423 ccw(c6.793,33.073) v1@7.959,31.906 ; R42.1@6.793,31.423 ccw(c6.793,33.073) v1@7.959,31.906 ; R42.1@6.793,31.423 ccw(c6.793,33.073) v1@7.959,31.906 ; R42.1@6.793,31.423 ccw(c6.793,33.073) v1@7.959,31.906 ; R42.1@6.793,31.423 ccw(c6.793,33.073) v1@7.959,31.906 ; 7.758,31.423 ccw(c7.758,32.107) v1@8.242,31.623 ; 7.758,31.423 ccw(c7.758,32.107) v1@8.242,31.623 ; 7.758,31.423 ccw(c7.758,32.107) v1@8.242,31.623 ; 7.758,31.423 ccw(c7.758,32.107) v1@8.242,31.623 ; 7.758,31.423 ccw(c7.758,32.107) v1@8.242,31.623 ; v4@7.959,28.545 ccw(c7.65,28.854) 8.087,28.854 ; v4@7.959,28.545 ccw(c7.65,28.854) 8.087,28.854 ; v4@7.959,28.545 ccw(c7.65,28.854) 8.087,28.854 ; v4@7.959,28.545 ccw(c7.65,28.854) 8.087,28.854 ; v4@7.959,29.722 cw(c7.65,29.413) 8.087,29.413 ; v4@7.959,29.722 cw(c7.65,29.413) 8.087,29.413 ; v4@7.959,29.722 cw(c7.65,29.413) 8.087,29.413 ; v4@7.959,29.722 cw(c7.65,29.413) 8.087,29.413 ; v4@7.959,29.978 ccw(c7.65,30.287) 8.087,30.287 ; v4@7.959,29.978 ccw(c7.65,30.287) 8.087,30.287 ; v4@7.959,29.978 ccw(c7.65,30.287) 8.087,30.287 ; v4@7.959,29.978 ccw(c7.65,30.287) 8.087,30.287 ; v1@7.959,31.65 cw(c7.65,31.341) 8.087,31.341 ; v1@7.959,31.65 cw(c7.65,31.341) 8.087,31.341 ; v1@7.959,31.65 cw(c7.65,31.341) 8.087,31.341 ; v1@7.959,31.65 cw(c7.65,31.341) 8.087,31.341 ; 8.087,28.854 ccw(c8.524,28.854) v4@8.215,28.545 ; 8.087,28.854 ccw(c8.524,28.854) v4@8.215,28.545 ; 8.087,28.854 ccw(c8.524,28.854) v4@8.215,28.545 ; 8.087,28.854 ccw(c8.524,28.854) v4@8.215,28.545 ; 8.087,29.413 cw(c8.524,29.413) v4@8.215,29.722 ; 8.087,29.413 cw(c8.524,29.413) v4@8.215,29.722 ; 8.087,29.413 cw(c8.524,29.413) v4@8.215,29.722 ; 8.087,29.413 cw(c8.524,29.413) v4@8.215,29.722 ; 8.087,30.287 ccw(c8.524,30.287) v4@8.215,29.978 ; 8.087,30.287 ccw(c8.524,30.287) v4@8.215,29.978 ; 8.087,30.287 ccw(c8.524,30.287) v4@8.215,29.978 ; 8.087,30.287 ccw(c8.524,30.287) v4@8.215,29.978 ; 8.087,31.341 cw(c8.524,31.341) v1@8.215,31.65 ; 8.087,31.341 cw(c8.524,31.341) v1@8.215,31.65 ; 8.087,31.341 cw(c8.524,31.341) v1@8.215,31.65 ; 8.087,31.341 cw(c8.524,31.341) v1@8.215,31.65 ; v1@8.087,31.959 ccw(c8.087,32.396) 8.396,32.087 ; v1@8.087,31.959 ccw(c8.087,32.396) 8.396,32.087 ; v1@8.087,31.959 ccw(c8.087,32.396) 8.396,32.087 ; v1@8.087,31.959 ccw(c8.087,32.396) 8.396,32.087 ; v1@8.087,31.959 ccw(c8.087,32.396) 8.396,32.087 ; v1@8.268,31.778 cw(c8.705,31.778) 8.396,32.087 ; v1@8.268,31.778 cw(c8.705,31.778) 8.396,32.087 ; v1@8.268,31.778 cw(c8.705,31.778) 8.396,32.087 ; v1@8.268,31.778 cw(c8.705,31.778) 8.396,32.087 ; v1@8.268,31.778 cw(c8.705,31.778) 8.396,32.087 ; 8.373,32.064 ccw(c8.064,32.373) v1@8.501,32.373 ; 8.373,32.064 cw(c8.682,31.755) v1@8.682,32.192 ; 8.373,32.064 ccw(c8.064,32.373) v1@8.501,32.373 ; 8.373,32.064 cw(c8.682,31.755) v1@8.682,32.192 ; 8.373,32.064 ccw(c8.064,32.373) v1@8.501,32.373 ; 8.373,32.064 cw(c8.682,31.755) v1@8.682,32.192 ; 8.373,32.064 ccw(c8.064,32.373) v1@8.501,32.373 ; 8.373,32.064 cw(c8.682,31.755) v1@8.682,32.192 ; 8.373,32.064 ccw(c8.064,32.373) v1@8.501,32.373 ; 8.373,32.064 cw(c8.682,31.755) v1@8.682,32.192 ; v1@10.842,52.692 cw(c11.151,52.383) 11.151,52.82 ; v1@10.842,52.692 cw(c11.151,52.383) 11.151,52.82 ; v1@10.842,52.692 cw(c11.151,52.383) 11.151,52.82 ; v1@10.842,52.692 cw(c11.151,52.383) 11.151,52.82 ; v1@10.842,52.692 cw(c11.151,52.383) 11.151,52.82 ; v1@10.842,52.948 ccw(c11.151,53.257) 11.151,52.82 ; v1@10.842,52.948 ccw(c11.151,53.257) 11.151,52.82 ; v1@10.842,52.948 ccw(c11.151,53.257) 11.151,52.82 ; v1@10.842,52.948 ccw(c11.151,53.257) 11.151,52.82 ; v1@10.842,52.948 ccw(c11.151,53.257) 11.151,52.82 ; 11.166,52.82 ccw(c11.166,53.257) v1@11.475,52.948 ; 11.166,52.82 cw(c11.166,52.383) v1@11.475,52.692 ; 11.166,52.82 ccw(c11.166,53.257) v1@11.475,52.948 ; 11.166,52.82 cw(c11.166,52.383) v1@11.475,52.692 ; 11.166,52.82 ccw(c11.166,53.257) v1@11.475,52.948 ; 11.166,52.82 cw(c11.166,52.383) v1@11.475,52.692 ; 11.166,52.82 ccw(c11.166,53.257) v1@11.475,52.948 ; 11.166,52.82 cw(c11.166,52.383) v1@11.475,52.692 ; 11.166,52.82 ccw(c11.166,53.257) v1@11.475,52.948 ; 11.166,52.82 cw(c11.166,52.383) v1@11.475,52.692 ; v1@11.731,52.692 cw(c12.04,52.383) 12.04,52.82 ; v1@11.731,52.692 cw(c12.04,52.383) 12.04,52.82 ; v1@11.731,52.692 cw(c12.04,52.383) 12.04,52.82 ; v1@11.731,52.692 cw(c12.04,52.383) 12.04,52.82 ; v1@11.731,52.692 cw(c12.04,52.383) 12.04,52.82 ; v1@11.731,52.948 ccw(c12.04,53.257) 12.04,52.82 ; v1@11.731,52.948 ccw(c12.04,53.257) 12.04,52.82 ; v1@11.731,52.948 ccw(c12.04,53.257) 12.04,52.82 ; v1@11.731,52.948 ccw(c12.04,53.257) 12.04,52.82 ; v1@11.731,52.948 ccw(c12.04,53.257) 12.04,52.82 ; v1@27.35,37.325 cw(c27.041,37.016) 27.478,37.016 ; v1@27.35,37.325 cw(c27.041,37.016) 27.478,37.016 ; v1@27.35,37.325 cw(c27.041,37.016) 27.478,37.016 ; v1@27.35,37.325 cw(c27.041,37.016) 27.478,37.016 ; v1@27.35,37.325 cw(c27.041,37.016) 27.478,37.016 ; 27.478,37.016 cw(c27.915,37.016) v1@27.606,37.325 ; 27.478,37.016 cw(c27.915,37.016) v1@27.606,37.325 ; 27.478,37.016 cw(c27.915,37.016) v1@27.606,37.325 ; 27.478,37.016 cw(c27.915,37.016) v1@27.606,37.325 ; 27.478,37.016 cw(c27.915,37.016) v1@27.606,37.325 ; 34.915,3.875 ccw(c34.915,4.312) v1@35.224,4.003 ; 34.915,3.875 cw(c34.915,3.438) v1@35.224,3.747 ; 34.915,3.875 ccw(c34.915,4.312) v1@35.224,4.003 ; 34.915,3.875 cw(c34.915,3.438) v1@35.224,3.747 ; 34.915,3.875 ccw(c34.915,4.312) v1@35.224,4.003 ; 34.915,3.875 cw(c34.915,3.438) v1@35.224,3.747 ; 34.915,3.875 ccw(c34.915,4.312) v1@35.224,4.003 ; 34.915,3.875 cw(c34.915,3.438) v1@35.224,3.747 ; 34.915,3.875 ccw(c34.915,4.312) v1@35.224,4.003 ; 34.915,3.875 cw(c34.915,3.438) v1@35.224,3.747 ; v1@35.48,3.747 cw(c35.789,3.438) 35.789,3.875 ; v1@35.48,3.747 cw(c35.789,3.438) 35.789,3.875 ; v1@35.48,3.747 cw(c35.789,3.438) 35.789,3.875 ; v1@35.48,3.747 cw(c35.789,3.438) 35.789,3.875 ; v1@35.48,3.747 cw(c35.789,3.438) 35.789,3.875 ; v1@35.48,4.003 ccw(c35.789,4.312) 35.789,3.875 ; v1@35.48,4.003 ccw(c35.789,4.312) 35.789,3.875 ; v1@35.48,4.003 ccw(c35.789,4.312) 35.789,3.875 ; v1@35.48,4.003 ccw(c35.789,4.312) 35.789,3.875 ; v1@35.48,4.003 ccw(c35.789,4.312) 35.789,3.875 ; 35.919,3.875 ccw(c35.919,4.312) v1@36.228,4.003 ; 35.919,3.875 cw(c35.919,3.438) v1@36.228,3.747 ; 35.919,3.875 ccw(c35.919,4.312) v1@36.228,4.003 ; 35.919,3.875 cw(c35.919,3.438) v1@36.228,3.747 ; 35.919,3.875 ccw(c35.919,4.312) v1@36.228,4.003 ; 35.919,3.875 cw(c35.919,3.438) v1@36.228,3.747 ; 35.919,3.875 ccw(c35.919,4.312) v1@36.228,4.003 ; 35.919,3.875 cw(c35.919,3.438) v1@36.228,3.747 ; 35.919,3.875 ccw(c35.919,4.312) v1@36.228,4.003 ; 35.919,3.875 cw(c35.919,3.438) v1@36.228,3.747 ; v1@36.228,4.003 ccw(c35.919,4.312) 36.356,4.312 ; v1@36.228,4.003 ccw(c35.919,4.312) 36.356,4.312 ; v1@36.228,4.003 ccw(c35.919,4.312) 36.356,4.312 ; v1@36.228,4.003 ccw(c35.919,4.312) 36.356,4.312 ; v1@36.228,4.003 ccw(c35.919,4.312) 36.356,4.312 ; 36.356,4.312 ccw(c36.793,4.312) v1@36.484,4.003 ; 36.356,4.312 ccw(c36.793,4.312) v1@36.484,4.003 ; 36.356,4.312 ccw(c36.793,4.312) v1@36.484,4.003 ; 36.356,4.312 ccw(c36.793,4.312) v1@36.484,4.003 ; 36.356,4.312 ccw(c36.793,4.312) v1@36.484,4.003
  Top Layer w0.8: 32.775,52.89 37.29,52.89 39.268,54.868 39.268,56.768 39.765,57.265 v1(40.77,57.265) v1(41.77,57.265) R9.1@43.1,57.265 ; C1.1@82.296,31.662 82.296,28.904 85.1,26.1 85.1,13.3
  Top Layer w2: v5(60.3,19.4) 60.3,17.823 62.784,15.339 62.784,13.958 64.943,11.799 64.943,9.386 68.229,6.1 76.2,6.1 79.2,9.1 82.4,9.1 84.073,10.773 84.073,12.273 ; v5@59.935,19.4 ccw(c62.861,19.4) v5@60.792,17.331 ; v5@59.935,19.4 ccw(c62.861,19.4) v5@60.792,17.331 ; v5@59.935,19.4 ccw(c62.861,19.4) v5@60.792,17.331
  MidLayer1 w0.4: v4@7.942,28.272 cw(c7.633,27.963) 8.07,27.963 cw(c8.507,27.963) v4@8.198,28.272 ; v4@7.942,28.528 ccw(c7.633,28.837) 8.07,28.837 ccw(c8.507,28.837) v4@8.198,28.528 ; v4@7.942,29.704 cw(c7.633,29.395) 8.07,29.395 cw(c8.507,29.395) v4@8.198,29.704 ; v4(8.087,29.85) 8.07,26.926 9.046,25.95 11.47,25.95 16.47,30.95 16.47,36.605 17.318,37.453 v1(27.478,37.453) 27.478,38.178 28,38.7 41.4,38.7 42.591,37.509 v1(42.591,28.055) ; v4@7.958,28.29 cw(c7.668,28.003) 8.076,28.001 ; v4@7.958,28.29 cw(c7.668,28.003) 8.076,28.001 ; v4@7.958,28.29 cw(c7.668,28.003) 8.076,28.001 ; v4@7.958,28.29 cw(c7.668,28.003) 8.076,28.001 ; v4@7.958,29.723 cw(c7.648,29.416) 8.085,29.413 ; v4@7.958,29.723 cw(c7.648,29.416) 8.085,29.413 ; v4@7.958,29.723 cw(c7.648,29.416) 8.085,29.413 ; v4@7.958,29.723 cw(c7.648,29.416) 8.085,29.413 ; v4@7.96,28.546 ccw(c7.673,28.836) 8.081,28.834 ; v4@7.96,28.546 ccw(c7.673,28.836) 8.081,28.834 ; v4@7.96,28.546 ccw(c7.673,28.836) 8.081,28.834 ; v4@7.96,28.546 ccw(c7.673,28.836) 8.081,28.834 ; 8.076,27.96 cw(c8.542,27.957) v4@8.214,28.288 ; 8.076,27.96 cw(c8.542,27.957) v4@8.214,28.288 ; 8.076,27.96 cw(c8.542,27.957) v4@8.214,28.288 ; 8.076,27.96 cw(c8.542,27.957) v4@8.214,28.288 ; 8.081,28.875 ccw(c8.547,28.872) v4@8.216,28.544 ; 8.081,28.875 ccw(c8.547,28.872) v4@8.216,28.544 ; 8.081,28.875 ccw(c8.547,28.872) v4@8.216,28.544 ; 8.081,28.875 ccw(c8.547,28.872) v4@8.216,28.544 ; 8.085,29.413 cw(c8.522,29.41) v4@8.214,29.721 ; 8.085,29.413 cw(c8.522,29.41) v4@8.214,29.721 ; 8.085,29.413 cw(c8.522,29.41) v4@8.214,29.721 ; 8.085,29.413 cw(c8.522,29.41) v4@8.214,29.721 ; 27.041,37.453 ccw(c27.041,37.89) v1@27.35,37.581 ; 27.041,37.453 cw(c27.041,37.016) v1@27.35,37.325 ; 27.041,37.453 ccw(c27.041,37.89) v1@27.35,37.581 ; 27.041,37.453 cw(c27.041,37.016) v1@27.35,37.325 ; 27.041,37.453 ccw(c27.041,37.89) v1@27.35,37.581 ; 27.041,37.453 cw(c27.041,37.016) v1@27.35,37.325 ; 27.041,37.453 ccw(c27.041,37.89) v1@27.35,37.581 ; 27.041,37.453 cw(c27.041,37.016) v1@27.35,37.325 ; 27.041,37.453 ccw(c27.041,37.89) v1@27.35,37.581 ; 27.041,37.453 cw(c27.041,37.016) v1@27.35,37.325
  MidLayer1 w0.8: v1(35.352,3.875) 39.607,3.862 40.411,4.666 v1(40.411,6.325)
  MidLayer1 w2: v1(10.714,52.82) 31.923,52.82 36.603,57.5 70.9,57.5 72.935,59.535 75.298,59.535 76.549,58.284 76.549,57.747 78.07,56.226 78.07,54.7 82.596,50.174 82.596,39.993 79.5,36.897 79.5,24.673 70.436,15.609 59.99,15.609 55.418,11.037 55.418,8.243 53.513,6.338 v1@40.471,6.325
  Bottom Layer w0.254: v1(19.604,45.535) 20.285,46.216 21.255,46.216 21.7,45.771 21.7,43.3 22.213,42.787 v1(25.319,42.787) ; v1@19.604,45.789 ccw(c19.604,46.402) 20.038,45.969 ccw(c20.471,45.535) v1@19.858,45.535 ; R68.2@21.255,31.931 20.874,31.55 20.874,31.103 21.89,30.087 21.89,25.717 22.473,25.134 26.335,25.134 26.97,25.769 26.97,28.69 27.732,29.452 33.955,29.452 35.098,28.309 40.432,28.309 40.823,28.7 41.946,28.7 v1(42.591,28.055) ; 24.706,42.787 ccw(c24.706,43.4) v1@25.139,42.967 ; 24.706,42.787 cw(c24.706,42.174) v1@25.139,42.607 ; 24.706,42.787 ccw(c24.706,43.4) v1@25.139,42.967 ; 24.706,42.787 cw(c24.706,42.174) v1@25.139,42.607 ; 24.706,42.787 ccw(c24.706,43.4) v1@25.139,42.967 ; 24.706,42.787 cw(c24.706,42.174) v1@25.139,42.607 ; 24.706,42.787 ccw(c24.706,43.4) v1@25.139,42.967 ; 24.706,42.787 cw(c24.706,42.174) v1@25.139,42.607 ; 24.706,42.787 ccw(c24.706,43.4) v1@25.139,42.967 ; 24.706,42.787 cw(c24.706,42.174) v1@25.139,42.607 ; 42.157,28.489 ccw(c42.591,28.922) v1@42.591,28.309 ; 42.157,28.489 cw(c41.724,28.055) v1@42.337,28.055 ; 42.157,28.489 ccw(c42.591,28.922) v1@42.591,28.309 ; 42.157,28.489 cw(c41.724,28.055) v1@42.337,28.055 ; 42.157,28.489 ccw(c42.591,28.922) v1@42.591,28.309 ; 42.157,28.489 cw(c41.724,28.055) v1@42.337,28.055 ; 42.157,28.489 ccw(c42.591,28.922) v1@42.591,28.309 ; 42.157,28.489 cw(c41.724,28.055) v1@42.337,28.055 ; 42.157,28.489 ccw(c42.591,28.922) v1@42.591,28.309 ; 42.157,28.489 cw(c41.724,28.055) v1@42.337,28.055
  Bottom Layer w0.4: v1@7.572,47.072 cw(c7.263,46.763) 7.7,46.763 cw(c8.137,46.763) v1@7.828,47.072 ; v1@7.7,47.381 ccw(c7.7,47.818) 8.009,47.509 ccw(c8.318,47.2) v1@7.881,47.2 ; v4@7.942,28.528 ccw(c7.689,28.781) v4@8.047,28.781 ; v4@7.942,29.704 cw(c7.689,29.451) 8.047,29.451 ; v4@7.942,29.96 ccw(c7.689,30.213) v4@8.047,30.213 ; 8.047,27.883 cw(c8.621,27.883) v4@8.215,28.289 ; 8.047,28.892 ccw(c8.563,28.892) v4@8.198,28.528 ; 8.047,29.34 cw(c8.563,29.34) v4@8.198,29.704 ; 8.047,30.325 ccw(c8.563,30.325) v4@8.198,29.96 ; v1@8.087,31.959 ccw(c8.087,32.396) 8.396,32.087 ccw(c8.705,31.778) v1@8.268,31.778 ; v1@8.501,32.373 cw(c8.064,32.373) 8.373,32.064 cw(c8.682,31.755) v1@8.682,32.192 ; v1@8.554,32.501 ccw(c7.325,33.73) 9.063,33.73 ; v1(8.8,21.8) 9.226,22.226 9.226,25.77 8.047,26.949 8.047,31.738 9.063,32.754 9.063,42.437 7.7,43.8 v1(7.7,47.2) 8.24,47.74 9.317,47.74 10.714,49.137 v1(10.714,52.82) ; v1@8.8,21.981 ccw(c8.8,22.418) 9.109,22.109 ccw(c9.418,21.8) v1@8.981,21.8 ; v1@8.837,32.218 ccw(c8.291,32.764) 9.063,32.764 ; v1@10.572,49.872 cw(c10.229,49.529) 10.714,49.529 ; v1@10.572,50.128 ccw(c10.229,50.471) 10.714,50.471 ; v1@10.586,52.692 cw(c10.277,52.383) 10.714,52.383 cw(c11.151,52.383) v1@10.842,52.692 ; 10.714,49.597 cw(c11.103,49.597) v1@10.828,49.872 ; 10.714,50.403 ccw(c11.103,50.403) v1@10.828,50.128 ; v1@11.472,50.128 ccw(c11.163,50.437) 11.6,50.437 ccw(c12.037,50.437) v1@11.728,50.128 ; v1@11.475,52.692 cw(c11.166,52.383) 11.603,52.383 cw(c12.04,52.383) v1@11.731,52.692 ; v1(11.6,50) v1(11.603,52.82) ; 8.047,28.951 ccw(c8.621,28.951) v4@8.215,28.545 ; 8.047,28.951 ccw(c8.621,28.951) v4@8.215,28.545 ; 8.047,28.951 ccw(c8.621,28.951) v4@8.215,28.545 ; 8.047,28.951 ccw(c8.621,28.951) v4@8.215,28.545 ; 8.047,29.316 cw(c8.621,29.316) v4@8.215,29.722 ; 8.047,29.316 cw(c8.621,29.316) v4@8.215,29.722 ; 8.047,29.316 cw(c8.621,29.316) v4@8.215,29.722 ; 8.047,29.316 cw(c8.621,29.316) v4@8.215,29.722 ; 8.047,30.384 ccw(c8.621,30.384) v4@8.215,29.978 ; 8.047,30.384 ccw(c8.621,30.384) v4@8.215,29.978 ; 8.047,30.384 ccw(c8.621,30.384) v4@8.215,29.978 ; 8.047,30.384 ccw(c8.621,30.384) v4@8.215,29.978 ; 8.047,31.244 cw(c8.621,31.244) v1@8.215,31.65 ; 8.047,31.244 cw(c8.621,31.244) v1@8.215,31.65 ; 8.047,31.244 cw(c8.621,31.244) v1@8.215,31.65 ; 8.047,31.244 cw(c8.621,31.244) v1@8.215,31.65 ; 8.047,31.244 cw(c8.621,31.244) v1@8.215,31.65 ; v1@8.695,32.36 ccw(c7.808,33.247) 9.063,33.247 ; v1@8.695,32.36 ccw(c7.808,33.247) 9.063,33.247 ; v1@8.695,32.36 ccw(c7.808,33.247) 9.063,33.247 ; v1@8.695,32.36 ccw(c7.808,33.247) 9.063,33.247 ; 10.208,48.631 ccw(c8.939,49.899) v1@10.733,49.899 ; 10.208,48.631 ccw(c8.939,49.899) v1@10.733,49.899 ; 10.208,48.631 ccw(c8.939,49.899) v1@10.733,49.899 ; 10.208,48.631 ccw(c8.939,49.899) v1@10.733,49.899
  other v1: 39.77,57.265
  other v5: 62.784,15.609 60.3,17.7
5V_split: R70.1 R71.2 U1.83 | length 41
  Top Layer w0.254: U1.83@18.247,37.294 18.247,36.27 18.461,36.056 ; 18.292,36.225 cw(c17.813,35.746) v1(18.461,35.548) ; 18.292,36.225 cw(c17.813,35.746) v1(18.461,35.548) ; 18.292,36.225 cw(c17.813,35.746) v1(18.461,35.548) ; 18.292,36.225 cw(c17.813,35.746) v1(18.461,35.548) ; 18.292,36.225 cw(c17.813,35.746) v1(18.461,35.548) ; v1@18.309,35.751 ccw(c18.08,36.056) 18.461,36.056 ; v1@18.309,35.751 ccw(c18.08,36.056) 18.461,36.056 ; v1@18.309,35.751 ccw(c18.08,36.056) 18.461,36.056 ; v1@18.309,35.751 ccw(c18.08,36.056) 18.461,36.056 ; v1@18.309,35.751 ccw(c18.08,36.056) 18.461,36.056 ; v1(18.461,35.548) 18.461,36.056 ; 18.461,36.056 ccw(c18.842,36.056) v1@18.613,35.751 ; 18.461,36.056 ccw(c18.842,36.056) v1@18.613,35.751 ; 18.461,36.056 ccw(c18.842,36.056) v1@18.613,35.751 ; 18.461,36.056 ccw(c18.842,36.056) v1@18.613,35.751 ; 18.461,36.056 ccw(c18.842,36.056) v1@18.613,35.751
  Bottom Layer w0.254: v1(18.461,35.548) 19.35,34.659 19.35,30.849 19.858,30.341 20.874,30.341 21.382,29.833 21.382,25.388 22.144,24.626 30.145,24.626 30.841,25.322 R71.2@30.841,28.309 R70.1@33.005,28.309 ; v1@18.461,35.294 cw(c18.461,34.681) 18.895,35.114 ; v1@18.461,35.294 cw(c18.461,34.681) 18.895,35.114 ; v1@18.461,35.294 cw(c18.461,34.681) 18.895,35.114 ; v1@18.461,35.294 cw(c18.461,34.681) 18.895,35.114 ; v1@18.461,35.294 cw(c18.461,34.681) 18.895,35.114 ; v1@18.715,35.548 ccw(c19.328,35.548) 18.895,35.114 ; v1@18.715,35.548 ccw(c19.328,35.548) 18.895,35.114 ; v1@18.715,35.548 ccw(c19.328,35.548) 18.895,35.114 ; v1@18.715,35.548 ccw(c19.328,35.548) 18.895,35.114 ; v1@18.715,35.548 ccw(c19.328,35.548) 18.895,35.114
ADC1: 
ADC2: 
ADC3: 
ADC4: 
ADC5: 
ADC6: 
ADC7: 
ADC8: 
ADC9: 
ADC10: 
ADC11: 
ADC_5V: 
ADC_batt: 
ADC_temp: 